# Altium PCB HRM_0.1.PcbDoc (part 1 of 2)
Units mm, origin at the board's own origin, x right, y up, seen from the top; angles counter-clockwise.
Board outline 50 x 50 mm, 2 copper layers (Top Layer, Bottom Layer), stack 1.62 mm thick; 75 components, 61 nets, 266 pads, 154 vias.
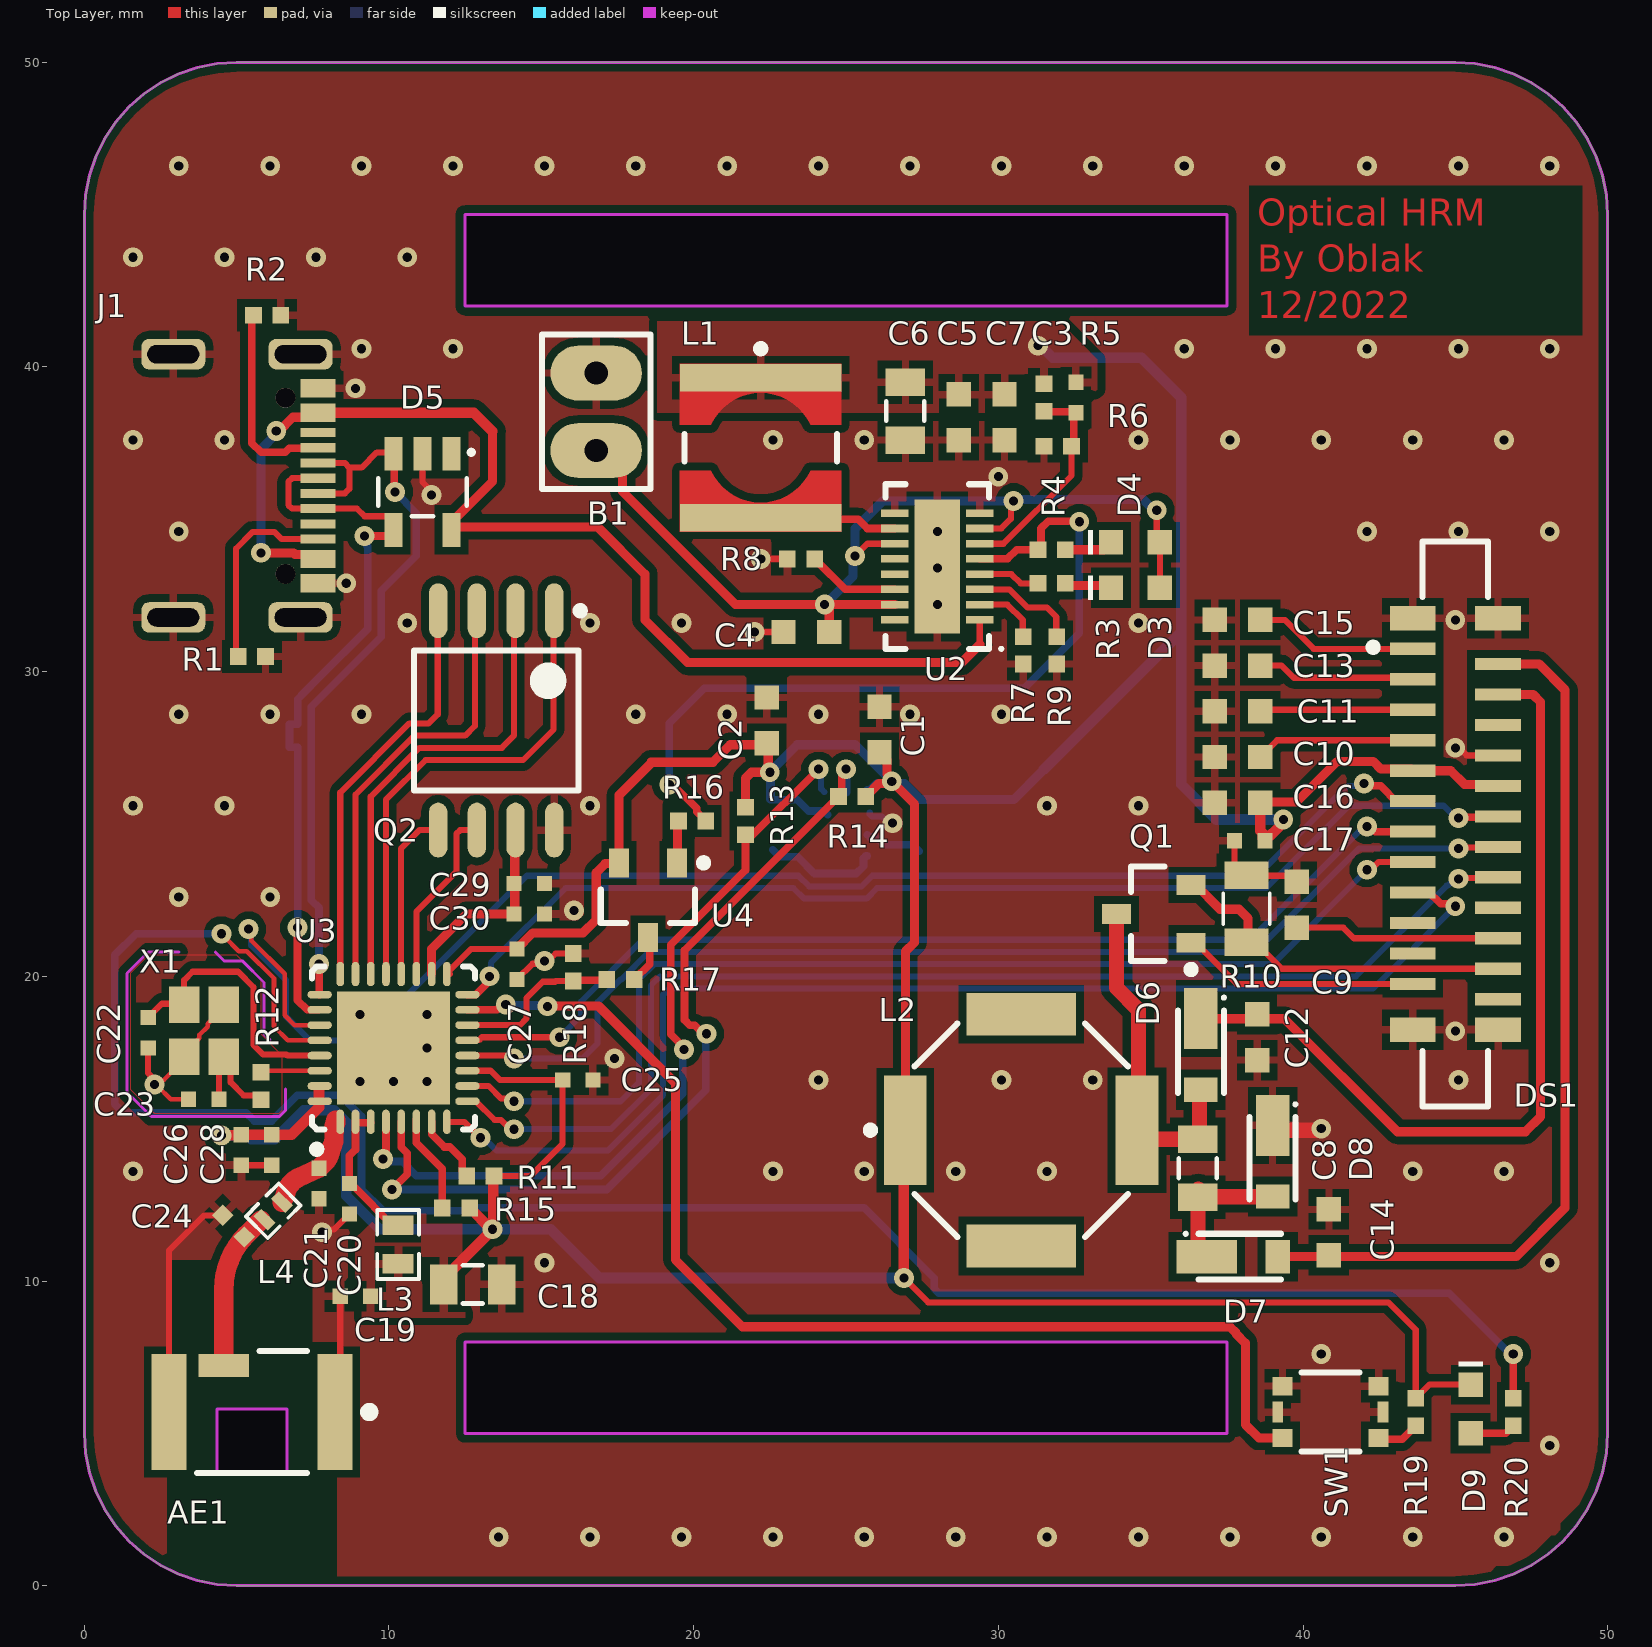
[diagram p0: Top Layer view]
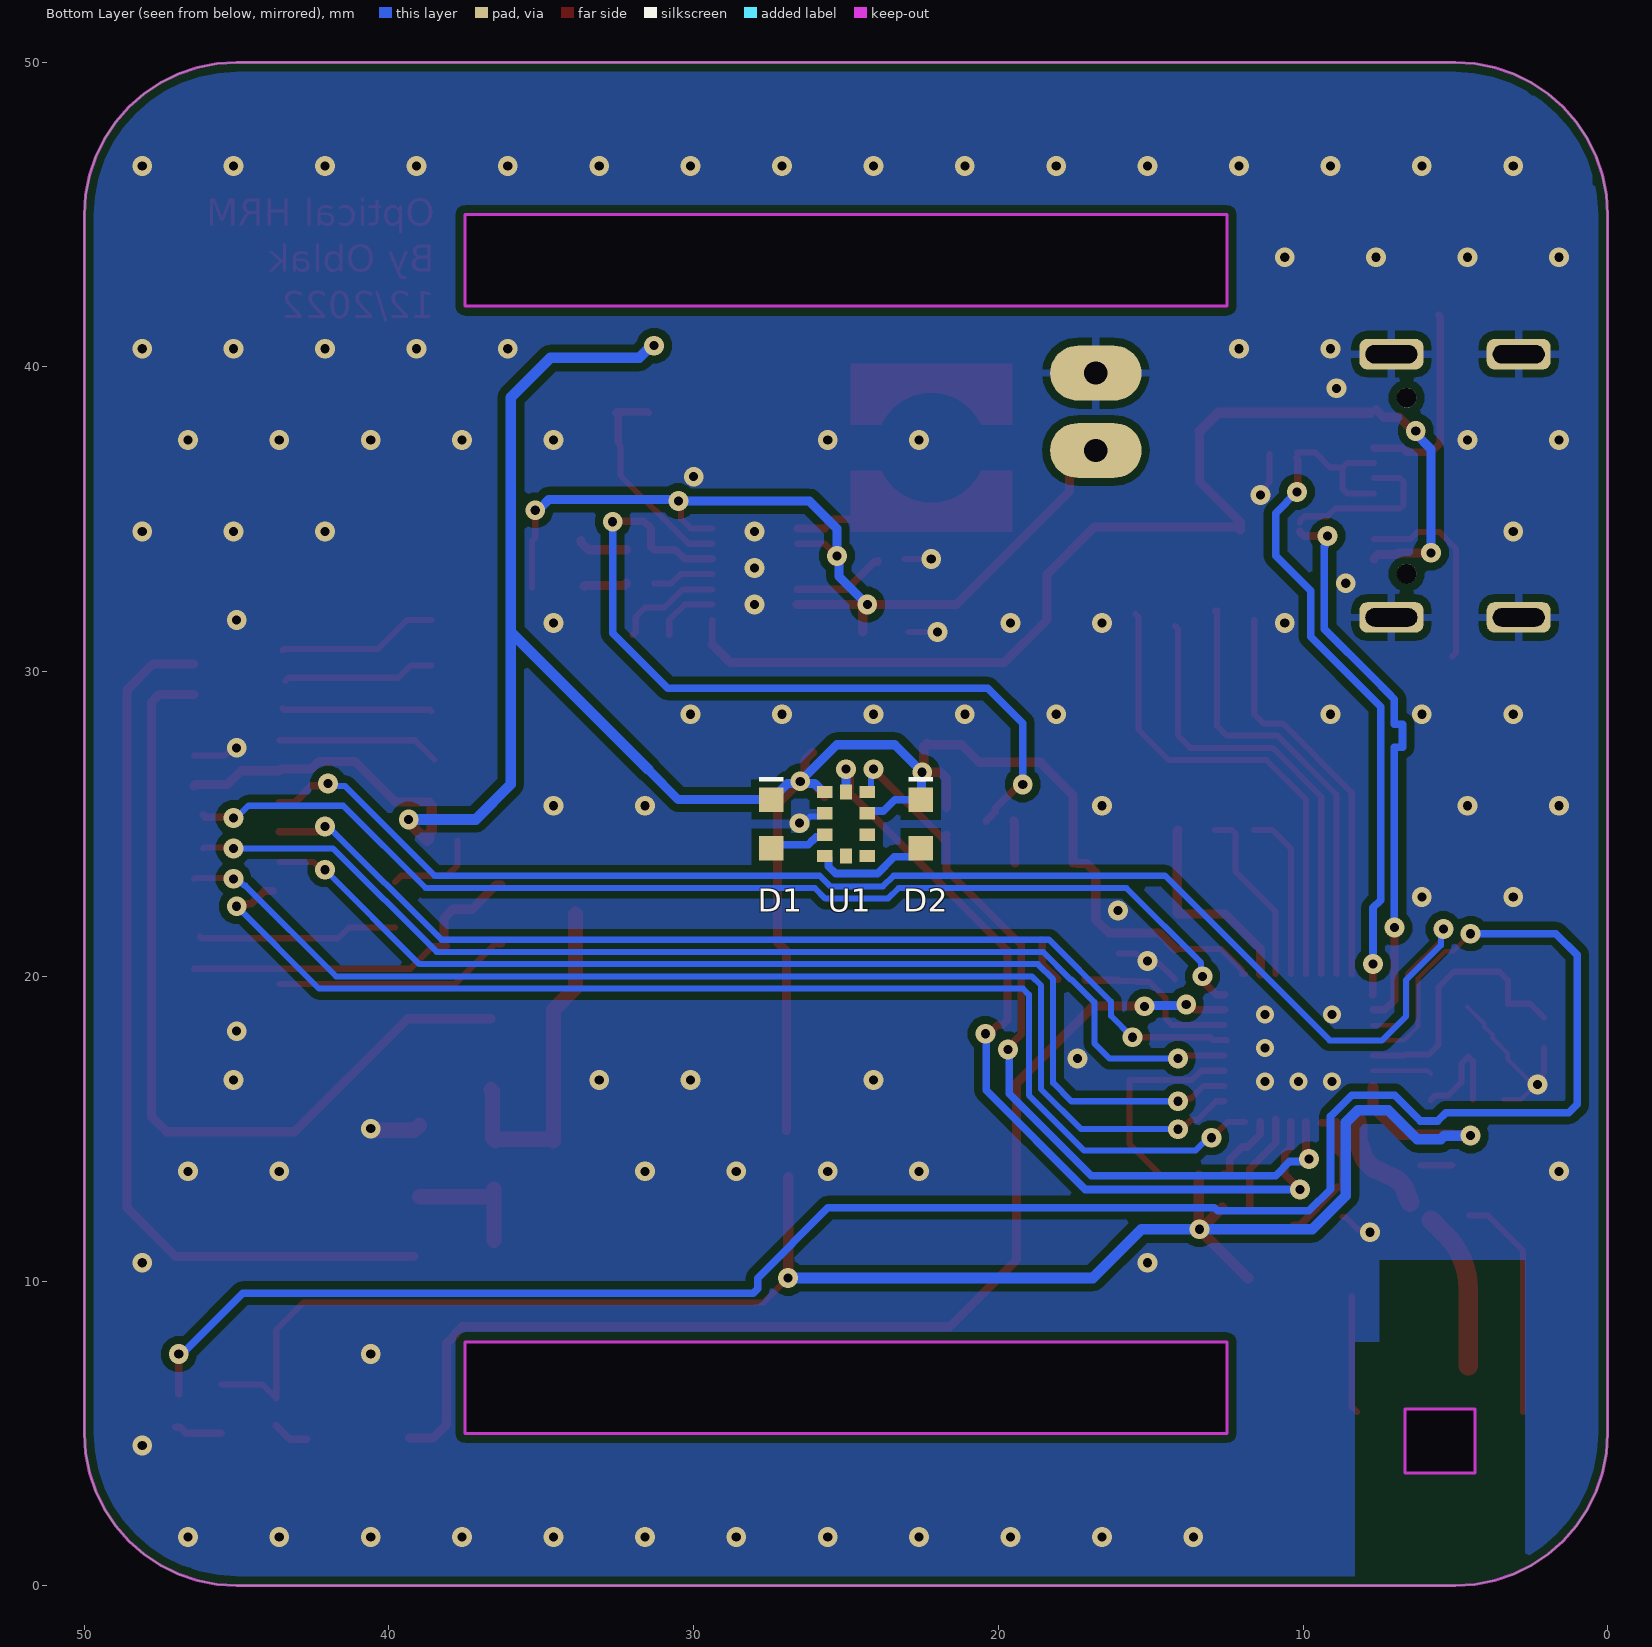
[diagram p1: Bottom Layer view, seen from below]
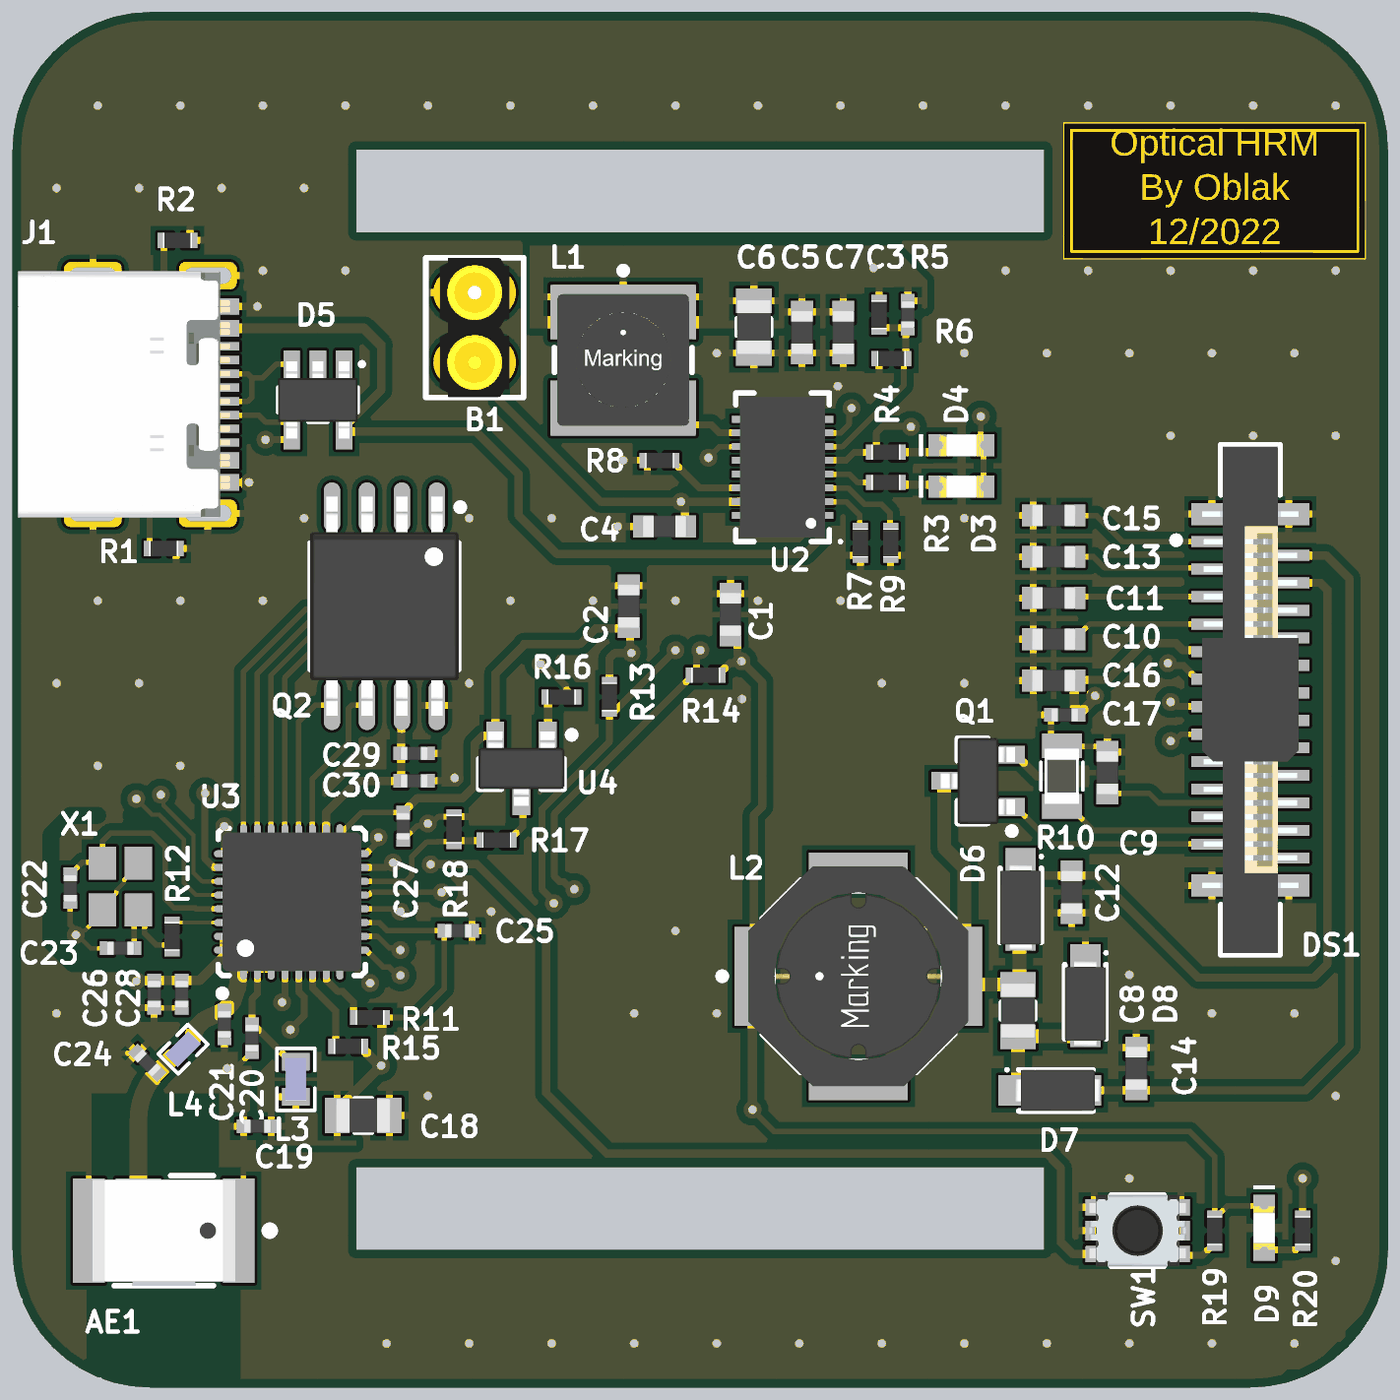
[diagram p2: 3D render of the assembled board from above, using the file's embedded part models]
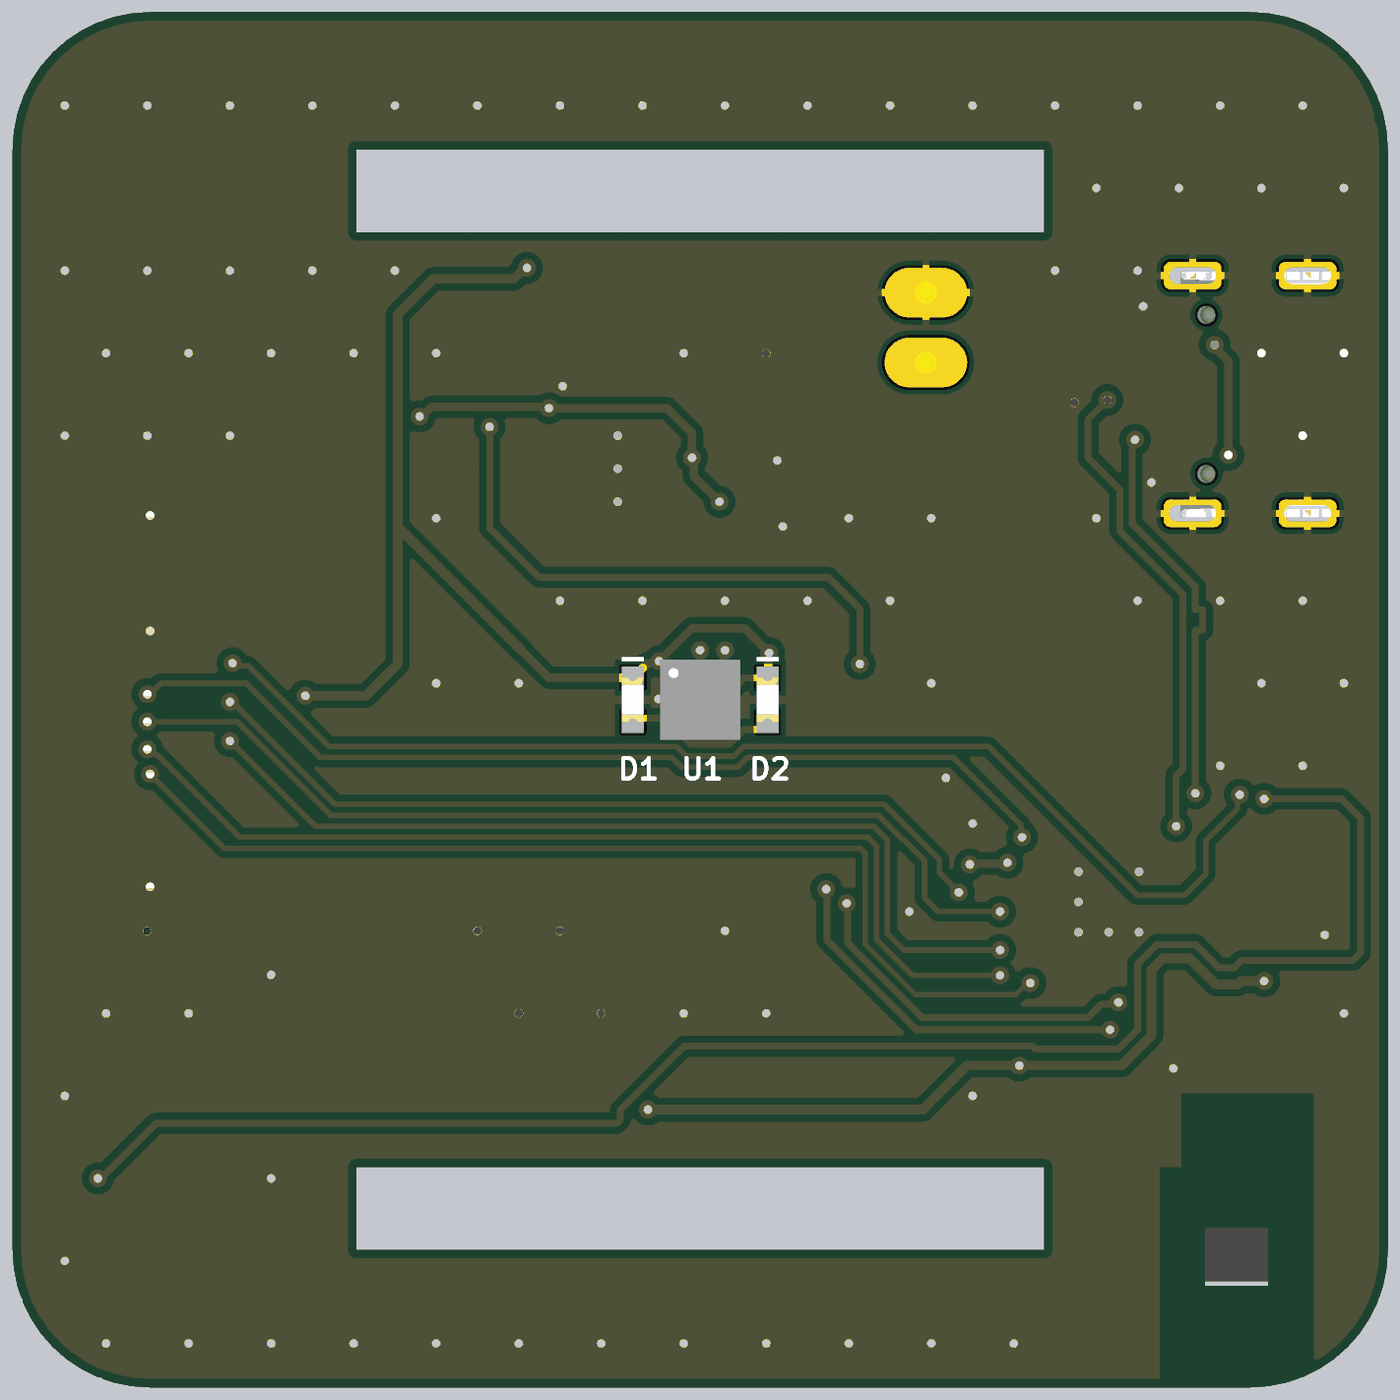
[diagram p3: 3D render of the assembled board from below, using the file's embedded part models]

## Layer stack, top to bottom
Top Solder: solder mask 0.01, Solder Resist, Dk 3.5
Top Layer: signal copper 0.035
Dielectric 1: dielectric 1.55, FR-4, Dk 4.6
Bottom Layer: signal copper 0.035
Bottom Solder: solder mask 0.01, Solder Resist, Dk 3.5

## Board outline
45,50 5,50 4.347,49.957 3.706,49.83 3.087,49.619 2.5,49.33 1.956,48.967 1.464,48.536 1.033,48.044 0.67,47.5 0.381,46.913 0.17,46.294 0.043,45.653 0,45 0,5 0.043,4.347 0.17,3.706 0.381,3.087 0.67,2.5 1.033,1.956 1.464,1.464 1.956,1.033 2.5,0.67 3.087,0.381 3.706,0.17 4.347,0.043 5,0 45,0 45.653,0.043 46.294,0.17 46.913,0.381 47.5,0.67 48.044,1.033 48.536,1.464 48.967,1.956 49.33,2.5 49.619,3.087 49.83,3.706 49.957,4.347 50,5 50,45 49.957,45.653 49.83,46.294 49.619,46.913 49.33,47.5 48.967,48.044 48.536,48.536 48.044,48.967 47.5,49.33 46.913,49.619 46.294,49.83 45.653,49.957
cut-out: 4.35,3.7 4.35,5.8 6.65,5.8 6.65,3.7
cut-out: 37.5,45 37.5,42 12.5,42 12.5,45
cut-out: 12.5,8 37.5,8 37.5,5 12.5,5

## Design rules (kind name [scope] priority, off if disabled: settings)
Clearance [All] p1: gap=0.254 ignorepadtopadclearanceinfootprint=TRUE except(0: Arc-Hole Track-Hole SMDPad-Hole THPad-Hole Via-Hole Fill-Hole Poly-Hole Region-Hole Text-Hole; 0.2: Arc-Arc Arc-Track Arc-SMDPad Arc-THPad Track-Track Track-SMDPad Track-THPad SMDPad-SMDPad SMDPad-THPad SMDPad-Via)
ComponentClearance [All] p1: gap=0.15 collisioncheckmode=3 verticalgap=0.254 showdistances=FALSE
PolygonConnect PolygonConnect_1 [isVia] p1: connectstyle=Direct reliefconductorwidth=0.254 reliefentries=4 polygonreliefangle="90 Angle" airgapwidth=0.254
PolygonConnect [All] p2: connectstyle=Relief reliefconductorwidth=0.254 reliefentries=4 polygonreliefangle="90 Angle" airgapwidth=0.254
RoutingVias [All] p1: holewidth=0.3 width=0.65 viastyle="Through Hole" minholewidth=0.25 minwidth=0.5 maxholewidth=5 maxwidth=10
SMDNeckDown [All] p1: percent=100.000
SolderMaskExpansion [All] p1: expansion=0.102 istentingtop=FALSE
Width Width_Antena [InNet('NetAE1_1')           or InNet('NetC21_2')] p1: maxlimit=0.637 minlimit=0.637 preferedwidth=0.637 impedanceprofiledriven=TRUE impedanceprofileid={48BE5413-D0CE-40BE-A353-7EF0BC3157F4} impedanceprofilevalue=50.000000 minimp=50.000000 maximp=50.000000 favimp=50.000000
Width [All] p2: maxlimit=10 minlimit=0.15 preferedwidth=0.35 minimp=50.000000 maximp=50.000000 favimp=50.000000
29 further rules are at their usual default settings.

## Classes and differential pairs
component class "U_USB-C PD": B1 C3 C4 C5 C6 C7 D3 D4 D5 J1 L1 R1 R2 R3 R4 R5 R6 R7 R8 R9 U2
component class U_HRM: C1 C2 D1 D2 U1
component class U_Display: C8 C9 C10 C11 C12 C13 C14 C15 C16 C17 D6 D7 D8 DS1 L2 Q1 R10
component class U_CPU: AE1 C18 C19 C20 C21 C22 C23 C24 C25 C26 C27 C28 C29 C30 D9 L3 L4 Q2 R11 R12 R13 R14 R15 R16 R17 R18 R19 R20 SW1 U3 U4 X1

## Components (designator, comment, footprint, x,y, rotation, side; value= is the part's Value field where it differs from the comment)
AE1 "7488960245" 7488960245 5.5,5.7 r180 top
B1 "Battery To be changed" letev2 16.8,37.26 r90 top
C1 "16V, 100nF" "0603_1.6x0.8x0.8mm_Reflow Soldering" 26.1,28.1 r270 top value=100nF
C2 "10V, 2.2uF" "0603_1.6x0.8x0.8mm_Reflow Soldering" 22.4,28.4 r270 top value=2.2uF
C3 "50V, 22pF" 0402_1x0.5x0.5mm 32.551,39 r90 top value=22pF
C4 "10V, 4.7uF" "0603_1.6x0.8x0.8mm_Reflow Soldering" 23.7,31.3 r0 top value=4.7uF
C5 "10V, 100nF" "0603_1.6x0.8x0.8mm_Reflow Soldering" 28.7,38.35 r90 top value=100nF
C6 "10V, 22uF" "0805_2x1.25x1.25mm_Reflow Soldering" 26.95,38.55 r90 top value=22uF
C7 "6.3V, 1uF" "0603_1.6x0.8x0.8mm_Reflow Soldering" 30.201,38.35 r90 top value=1uF
C8 "25V, 4.7uF" "0805_2x1.25x1.25mm_Reflow Soldering" 36.55,13.7 r90 top value=4.7uF
C9 "25V, 1uF" "0603_1.6x0.8x0.8mm_Reflow Soldering" 39.8,22.349 r270 top value=1uF
C10 "25V, 1uF" "0603_1.6x0.8x0.8mm_Reflow Soldering" 37.85,27.2 r0 top value=1uF
C11 "25V, 1uF" "0603_1.6x0.8x0.8mm_Reflow Soldering" 37.85,28.7 r0 top value=1uF
C12 "25V, 1uF" "0603_1.6x0.8x0.8mm_Reflow Soldering" 38.501,18 r90 top value=1uF
C13 "25V, 1uF" "0603_1.6x0.8x0.8mm_Reflow Soldering" 37.85,30.2 r0 top value=1uF
C14 "25V, 1uF" "0603_1.6x0.8x0.8mm_Reflow Soldering" 40.85,11.6 r270 top value=1uF
C15 "25V, 1uF" "0603_1.6x0.8x0.8mm_Reflow Soldering" 37.85,31.7 r0 top value=1uF
C16 "25V, 1uF" "0603_1.6x0.8x0.8mm_Reflow Soldering" 37.85,25.699 r0 top value=1uF
C17 "25V, 100nF" 0402_1x0.5x0.5mm 38.25,24.449 r0 top value=100nF
C18 "10V, 22uF" "0805_2x1.25x1.25mm_Reflow Soldering" 12.749,9.886 r0 top value=22uF
C19 "25V, 100nF" 0402_1x0.5x0.5mm 8.9,9.5 r0 top value=100nF
C20 "25V, 100nF" 0402_1x0.5x0.5mm 8.7,12.7 r90 top value=100nF
C21 "TBD" 0402_1x0.5x0.5mm 7.7,13.2 r90 top value=2.2pF
C22 "TBD" 0402_1x0.5x0.5mm 2.096,18.15 r90 top value=2.2pF
C23 "TBD" 0402_1x0.5x0.5mm 3.923,15.965 r0 top value=2.2pF
C24 "TBD" 0402_1x0.5x0.5mm 4.9,11.8 r315 top value=2.2pF
C25 "25V, 100nF" 0402_1x0.5x0.5mm 16.2,16.6 r180 top value=100nF
C26 "10V, 1uF" 0402_1x0.5x0.5mm 5.15,14.3 r90 top value=1uF
C27 "25V, 100nF" 0402_1x0.5x0.5mm 14.2,20.4 r90 top value=100nF
C28 "10V, 10nF" 0402_1x0.5x0.5mm 6.15,14.3 r90 top value=10nF
C29 "25V, 100nF" 0402_1x0.5x0.5mm 14.6,23.05 r180 top value=100nF
C30 "10V, 1uF" 0402_1x0.5x0.5mm 14.6,22.05 r180 top value=1uF
D1 "Bright Green, 2V, 140°" WL-SMCW_0603_150060xx75003 27.45,25 r270 bottom
D2 "Bright Green, 2V, 140°" WL-SMCW_0603_150060xx75003 22.55,25 r270 bottom
D3 "Amber, 2V, 140°" WL-SMCW_0603_150060xx75000 34.5,32.75 r0 top
D4 "Amber, 2V, 140°" WL-SMCW_0603_150060xx75000 34.5,34.25 r0 top
D5 "5V" WE-TVS_SOT23-5L 11.1,35.9 r180 top
D6 "CUHS20F40" "Topshiba US2H" 36.65,17.45 r270 top
D7 "CUHS20F40" "Topshiba US2H" 38,10.8 r0 top
D8 "CUHS20F40" "Topshiba US2H" 39,13.95 r270 top
D9 "Green, 3.2V, 140°" WL-SMCW_0603_150060xx75003 45.5,5.8 r270 top
DS1 "1.54” TFT EPD Panel" 687324124422 45,25 r90 top
J1 "USB C connector" USB4105-15-A-120 7.1,36.1 r270 top
L1 "1.8µH, 2.7A" WE-TPC_4828 22.2,37.35 r0 top
L2 "10µH, 2A" WE-TPC_8020 30.75,14.95 r90 top
L3 "2nH, 1.9A" "0603CT SERIES" 10.3,11.2 r90 top
L4 "TBD" "0402CS SERIES" 6.2,12.3 r225 top
Q1 "PJA3430" SOT23 35.1,22.05 r180 top
Q2 "BC857" SOT23 18.5,22.5 r270 top
R1 "Res2-smd" R0402 5.5,30.5 r180 top value=36k
R2 "Res2-smd" R0402 6,41.7 r180 top value=36k
R3 "220R" R0402 31.75,32.9 r180 top
R4 "220R" R0402 31.75,34 r180 top
R5 "Res2-smd" R0402 31.501,39 r90 top value=453k
R6 "Res2-smd" R0402 31.951,37.4 r0 top value=453k
R7 "Res2-smd" R0402 30.82,30.7 r90 top value="2k1 1%"
R8 "Res2-smd" R0402 23.523,33.7 r0 top value="1k24 1%"
R9 "Res2-smd" R0402 31.921,30.7 r90 top value="1k 1%"
R10 "Res2-smd" RES0805_1 38.148,22.222 r270 top value=0.47R
R11 "10k" R0402 13,13.45 r0 top
R12 "TBD" R0402 5.8,16.4 r270 top
R13 "10k" R0402 21.7,25.1 r90 top
R14 "10k" R0402 25.2,25.9 r0 top
R15 "10k" R0402 12.2,12.4 r0 top
R16 "1k" R0402 19.95,25.1 r0 top
R17 "4k7" R0402 17.6,19.9 r0 top
R18 "22k" R0402 16.05,20.3 r270 top
R19 "10k" R0402 43.7,5.7 r90 top
R20 "220R" R0402 46.9,5.7 r270 top
SW1 "435151014845" WS-TASV_L3W2.6H1.4_4351x10148xx 40.9,5.7 r0 top
U1 "BH1790GLC" WLGA010V28_ROHM 25,25 r180 bottom locked
U2 "LTC3550" "DHC16 Linear" 27.995,33.45 r180 top
U3 "ESP32-C3" "32L SLP Expressif" 10.15,17.65 r90 top
U4 "AT25SF041B" "SOIC8 Wide dialog semi" 13.52,28.4 r270 top
X1 "ECX-2236B2" "2.5 x 2.0 mm XTAL" 3.923,18.215 r270 top

## Footprints (in the part's own frame and the unit in brackets; to place one, negate y for a bottom-side part, rotate by r counter-clockwise, add the part's x,y. Pads: shape width x height; smd on the part's side, far side on the other; paste and mask are expansions set on the pad)
"2.5 x 2.0 mm XTAL" [mm]
  rect 1.2x1 smd: 1(-0.85,-0.65) 2(0.85,-0.65) 3(0.85,0.65) 4(-0.85,0.65)
  body extent -1.25,-1 1.25,1, height 0.25
"32L SLP Expressif" [mm] "QFN, 32-Leads, Body 5,00x5,00mm, Pitch 0,50mm, Thermal Pad 3,70x3,70mm, IPC Medium Density"
  oval 0.8x0.25 smd: 1(-2.425,1.75) 2(-2.425,1.25) 3(-2.425,0.75) 4(-2.425,0.25) 5(-2.425,-0.25) 6(-2.425,-0.75) 7(-2.425,-1.25) 8(-2.425,-1.75) 17(2.425,-1.75) 18(2.425,-1.25) 19(2.425,-0.75) 20(2.425,-0.25) 21(2.425,0.25) 22(2.425,0.75) 23(2.425,1.25) 24(2.425,1.75)
  oval 0.25x0.8 smd: 9(-1.75,-2.425) 10(-1.25,-2.425) 11(-0.75,-2.425) 12(-0.25,-2.425) 13(0.25,-2.425) 14(0.75,-2.425) 15(1.25,-2.425) 16(1.75,-2.425) 25(1.75,2.425) 26(1.25,2.425) 27(0.75,2.425) 28(0.25,2.425) 29(-0.25,2.425) 30(-0.75,2.425) 31(-1.25,2.425) 32(-1.75,2.425)
  rect 3.7x3.7 smd: 33(0,0)
  silkscreen extent -3.45,-2.68 2.68,2.67, body extent -2.53,-2.53 2.53,2.53, height 0.9
0402_1x0.5x0.5mm [mm] "Ceramic Capacitors, 0402, body 1x0.5mm"
  rect 0.5x0.5 smd: 1(-0.5,0) 2(0.5,0)
  body extent -0.5,-0.25 0.5,0.25, height 0.53
"0402CS SERIES" [mil] "Coilcraft Chip Inductor"
  rect 14x26 smd: 1(-16,0) 2(16,0)
  silkscreen extent -30,-20 30,20, body extent -23,-13 23,13, height 26
"0603_1.6x0.8x0.8mm_Reflow Soldering" [mm] "Ceramic Capacitors, 0603, body 1.6x0.8mm"
  rect 0.8x0.8 smd: 1(-0.75,0) 2(0.75,0)
  body extent -0.8,-0.4 0.8,0.4, height 0.83
"0603CT SERIES" [mil] "Coilcraft Chip Inductor"
  rect 25x40 smd: 1(-25,0) 2(25,0)
  silkscreen extent -44,-27 44,27, body extent -30,-15 30,15, height 21
"0805_2x1.25x1.25mm_Reflow Soldering" [mm] "Ceramic Capacitors, 0805, body 2x1.25mm"
  rect 0.9x1.3 smd: 1(-0.95,0) 2(0.95,0)
  silkscreen extent -0.32,-0.62 0.32,0.63, body extent -1,-0.62 1,0.63, height 1.28
7488960245 [mm] "SMT-Multilayer Chip Antenne, body size 5.2x3.7mm"
  rect 1.65x0.75 smd: 1(0.925,-1.525)
  rect 1.15x3.8 smd: 2(-2.725,0) 3(2.725,0)
  silkscreen extent -4,-2 1.8,2, body extent -2.6,-1.85 2.6,1.85, height 0.7
687324124422 [mm] "ZIF Connectors, Vertical, Type A, pitch 0.5mm, 24p"
  rect 0.4x1.5 smd: 1(-5.75,-1.4) 2(-5.25,1.4) 3(-4.75,-1.4) 4(-4.25,1.4) 5(-3.75,-1.4) 6(-3.25,1.4) 7(-2.75,-1.4) 8(-2.25,1.4) 9(-1.75,-1.4) 10(-1.25,1.4) 11(-0.75,-1.4) 12(-0.25,1.4) 13(0.25,-1.4) 14(0.75,1.4) 15(1.25,-1.4) 16(1.75,1.4) 17(2.25,-1.4) 18(2.75,1.4) 19(3.25,-1.4) 20(3.75,1.4) 21(4.25,-1.4) 22(4.75,1.4) 23(5.25,-1.4) 24(5.75,1.4)
  rect 0.8x1.5 smd: M1(-6.75,-1.4) M2(-6.75,1.4) M3(6.75,-1.4) M4(6.75,1.4)
  silkscreen extent -9.27,-1.07 9.28,2.82, body extent -9.2,-1.75 9.2,1.75, height 4.92
"DHC16 Linear" [mm] "SON, 16-Leads, Body 5,00x3,00mm, Pitch 0,50mm, Thermal Pad 4,40x1,49mm, IPC Medium Density"
  rect 0.9x0.25 smd: 1(-1.395,1.75) 2(-1.395,1.25) 3(-1.395,0.75) 4(-1.395,0.25) 5(-1.395,-0.25) 6(-1.395,-0.75) 7(-1.395,-1.25) 8(-1.395,-1.75) 9(1.395,-1.75) 10(1.395,-1.25) 11(1.395,-0.75) 12(1.395,-0.25) 13(1.395,0.25) 14(1.395,0.75) 15(1.395,1.25) 16(1.395,1.75)
  rect 1.49x4.4 smd: 17(0,0)
  silkscreen extent -2.15,-2.7 1.7,2.75, body extent -1.55,-2.55 1.55,2.55, height 0.8
letev2 [mm]
  oval 1.8x3 hole 0.762: 1(0,0) 2(2.54,0)
  silkscreen extent -1.27,-1.78 3.81,1.78, body extent -1.27,-1.27 3.81,1.27, height 5.1
R0402 [mm]
  rect 0.55x0.55 smd: 1(-0.45,0) 2(0.45,0)
  body extent -0.53,-0.28 0.53,0.28, height 0.37
RES0805_1 [mm]
  rect 0.9x1.45 smd: 1(-1.1,0) 2(1.1,0)
  silkscreen extent -0.51,-0.76 0.51,0.76, body extent -1,-0.64 1,0.62, height 0.62
"SOIC8 Wide dialog semi" [mm] "SOIC, 8-Leads, Body 5,24x5,29mm, Pitch 1,27mm, IPC Medium Density"
  oval 1.8x0.6 smd: 1(-3.6,1.905) 2(-3.6,0.635) 3(-3.6,-0.635) 4(-3.6,-1.905) 5(3.6,-1.905) 6(3.6,-0.635) 7(3.6,0.635) 8(3.6,1.905)
  silkscreen extent -3.72,-2.7 2.3,2.88, body extent -3.99,-2.7 3.99,2.7, height 2.16
SOT23 [mm] "SOT23, 3-Leads, Body 2,93x2,40mm, Pitch 0,95mm, IPC Medium Density"
  rect 0.95x0.65 smd: 1(-1.225,0.95) 2(-1.225,-0.95) 3(1.225,0)
  silkscreen extent -1.35,-1.55 0.75,1.95, body extent -1.35,-1.57 1.35,1.57, height 1.2
"Topshiba US2H" [mm] "Molded Diode, 2-Leads, Body 2,50x1,40mm, IPC Medium Density"
  rect 2x1.1 smd: 1(-1.16,0)
  rect 0.8x1.1 smd: 2(1.175,0)
  silkscreen extent -1.9,-0.75 1.27,0.8, body extent -1.57,-0.75 1.57,0.75, height 0.7
USB4105-15-A-120 [mm]
  rect 0.6x1.15 smd: A1(-3.2,0.575) A4(-2.4,0.575) A9(2.4,0.575) A12(3.2,0.575)
  rect 0.3x1.15 smd: A5(-1.25,0.575) A6(-0.25,0.575) A7(0.25,0.575) A8(1.25,0.575) B5(1.75,0.575) B6(0.75,0.575) B7(-0.75,0.575) B8(-1.75,0.575)
  rrect50% 1x2.1 hole 0.6 slot 1.7 at 90 deg: Shield(-4.32,0) Shield(-4.32,-4.18) Shield(4.32,0) Shield(4.32,-4.18)
  round 0.65 hole 0.65 unplated: ""(-2.89,-0.5) ""(2.89,-0.5)
  body extent -4.47,-6.9 4.47,0.8, height 3.26
WE-TPC_4828 [mm] "Power Inductor, SMD, 2-Leads, body 4.8x4.8mm"
  rect 5.3x0.9 smd paste-403.566 mask-403.566: 1(0,2.3) 2(0,-2.3)
  Top Layer region: 2.65,-0.75 1.636,-0.75 1.636,-0.75 1.138,-1.394 0.407,-1.753 -0.407,-1.753 -1.138,-1.394 -1.636,-0.75 -1.636,-0.75 -2.65,-0.75 -2.65,-0.75 -2.65,-2.75 2.65,-2.75
  Top Layer region: -2.65,0.75 -1.636,0.75 -1.636,0.75 -1.138,1.394 -0.407,1.753 0.407,1.753 1.138,1.394 1.636,0.75 1.636,0.75 2.65,0.75 2.65,0.75 2.65,2.75 -2.65,2.75
  silkscreen extent -2.5,-0.45 2.5,3.37, body extent -2.4,-2.4 2.4,2.4, height 2.8
WE-TPC_8020 [mm] "Power Inductor, SMD, 4-Leads, body 8.0x8.0mm"
  rect 3.6x1.4 smd: 1(0,3.8) 2(0,-3.8)
  rect 1.4x3.6 smd: MP1(-3.8,0) MP2(3.8,0)
  silkscreen extent -3.5,-3.5 3.5,5.07, body extent -4,-4 4,4, height 1.8
WE-TVS_SOT23-5L [mm] "TVS Diode, package SOT23-5L"
  rect 0.6x1.1 smd: 1(-0.95,-1.25) 2(0,-1.25) 3(0.95,-1.25) 4(0.95,1.25) 5(-0.95,1.25)
  silkscreen extent -1.68,-1.37 1.45,0.8, body extent -1.45,-1.4 1.45,1.4, height 1.16
WL-SMCW_0603_150060xx75000 [mm] "SMD Mono-color Chip LED, body 1.6x0.8mm"
  rect 0.8x0.8 smd: A(0.8,0) K(-0.8,0)
  silkscreen extent -1.55,-0.4 -1.4,0.4, body extent -0.8,-0.4 0.8,0.4, height 0.7
WL-SMCW_0603_150060xx75003 [mm] "SMD Mono-color Chip LED, body 1.6x0.8mm"
  rect 0.8x0.8 smd: A(-0.8,0) K(0.8,0)
  silkscreen extent -1.55,-0.4 -1.4,0.4, body extent -0.8,-0.4 0.8,0.4, height 0.7
WLGA010V28_ROHM [mm] "LGA, 10-Leads, Body 2,80x2,80mmx1,00mm, Pitch 0,70mm"
  rect 0.5x0.4 smd: 1(-0.7,1.05) 2(-0.7,0.35) 3(-0.7,-0.35) 4(-0.7,-1.05) 6(0.7,-1.05) 7(0.7,-0.35) 8(0.7,0.35) 9(0.7,1.05)
  rect 0.4x0.5 smd: 5(0,-1.05) 10(0,1.05)
  body extent -1.45,-1.45 1.45,1.45, height 1
WS-TASV_L3W2.6H1.4_4351x10148xx [mm] "SMD Tact Switch, body 3x2.6mm"
  rect 0.65x0.6 smd: A1(-1.575,0.85) A2(1.575,0.85) B1(-1.575,-0.85) B2(1.575,-0.85)
  rect 0.35x0.7 smd: G1(-1.725,0) G2(1.725,0)
  silkscreen extent -0.95,-1.3 0.95,1.3, body extent -1.75,-1.3 1.75,1.3, height 1.43

## Part data
AE1: "WE-MCA SMT Multilayer Chip Antenna, 1 Band, 2400-2500MHz, 50Ω", Frequency Range=2400-2500MHz, Manufacturer="Wurth Elektronik", Operating Temperature Max=85°C, Operating Temperature Min=-40°C, Category=Antennas, ComponentLink1Description="Website Link", ComponentLink1URL=https://www.we-online.com/redexpert/article/7488960245?ad, ComponentLink2Description="Datasheet Link", ComponentLink2URL=https://www.we-online.com/redexpert/spec/7488960245?ad, Height=0.7mm, Impedance=50Ω, Length=5.2mm, Manufacturer Part Number=7488960245, Match Code=WE-MCA, Mount="Surface Mount", Number of Bands=1, Packaging="Tape and Reel", Peak Gain=3dBi, VSWR=2.5, Width=3.7mm
B1: library part header2
C1: library part 885012206046, "WCAP-CSGP Ceramic Capacitors, 0603, X7R, 16V, 100nF", Operating Temperature="-55 °C to +125 °C", Rated Voltage="16V DC", Ceramic Type=X7R, ComponentLink1Description=Manufacturer, ComponentLink1URL=http://www.we-online.de, ComponentLink2Description=Datasheet, ComponentLink2URL=http://katalog.we-online.de/pbs/datasheet/885012206046.pdf, Part Number=885012206046, Published Date="Oct. 2017", Publisher="Wurth Elektronik", Size=0603
C2: library part 885012206027, "WCAP-CSGP Ceramic Capacitors, 0603, X7R, 10V, 2.2uF", Operating Temperature="-55 °C to +125 °C", Rated Voltage="10V DC", Ceramic Type=X7R, ComponentLink1Description=Manufacturer, ComponentLink1URL=http://www.we-online.de, ComponentLink2Description=Datasheet, ComponentLink2URL=http://katalog.we-online.de/pbs/datasheet/885012206027.pdf, Part Number=885012206027, Published Date="Oct. 2017", Publisher="Wurth Elektronik", Size=0603
C3: library part 885012005057, "WCAP-CSGP Ceramic Capacitors, 0402, NP0, 50V, 22pF", Operating Temperature="-55 °C to +125 °C", Rated Voltage="50V DC", Ceramic Type=NP0, ComponentLink1Description=Manufacturer, ComponentLink1URL=http://www.we-online.de, ComponentLink2Description=Datasheet, ComponentLink2URL=http://katalog.we-online.de/pbs/datasheet/885012005057.pdf, Part Number=885012005057, Published Date="Oct. 2017", Publisher="Wurth Elektronik", Size=0402
C4: library part 885012106012, "WCAP-CSGP Ceramic Capacitors, 0603, X5R, 10V, 4.7uF", Operating Temperature="-55 °C to +125 °C", Rated Voltage="10V DC", Ceramic Type=X5R, ComponentLink1Description=Manufacturer, ComponentLink1URL=http://www.we-online.de, ComponentLink2Description=Datasheet, ComponentLink2URL=http://katalog.we-online.de/pbs/datasheet/885012106012.pdf, Part Number=885012106012, Published Date="Oct. 2017", Publisher="Wurth Elektronik", Size=0603
C5: library part 885012206020, "WCAP-CSGP Ceramic Capacitors, 0603, X7R, 10V, 100nF", Operating Temperature="-55 °C to +125 °C", Rated Voltage="10V DC", Ceramic Type=X7R, ComponentLink1Description=Manufacturer, ComponentLink1URL=http://www.we-online.de, ComponentLink2Description=Datasheet, ComponentLink2URL=http://katalog.we-online.de/pbs/datasheet/885012206020.pdf, Part Number=885012206020, Published Date="Oct. 2017", Publisher="Wurth Elektronik", Size=0603
C6 C18: library part 885012107011, "WCAP-CSGP Ceramic Capacitors, 0805, X5R, 10V, 22uF", Operating Temperature="-55 °C to +125 °C", Rated Voltage="10V DC", Ceramic Type=X5R, ComponentLink1Description=Manufacturer, ComponentLink1URL=http://www.we-online.de, ComponentLink2Description=Datasheet, ComponentLink2URL=http://katalog.we-online.de/pbs/datasheet/885012107011.pdf, Part Number=885012107011, Published Date="Oct. 2017", Publisher="Wurth Elektronik", Size=0805
C7: library part 885012106003, "WCAP-CSGP Ceramic Capacitors, 0603, X5R, 6.3V, 1uF", Operating Temperature="-55 °C to +125 °C", Rated Voltage="6.3V DC", Ceramic Type=X5R, ComponentLink1Description=Manufacturer, ComponentLink1URL=http://www.we-online.de, ComponentLink2Description=Datasheet, ComponentLink2URL=http://katalog.we-online.de/pbs/datasheet/885012106003.pdf, Part Number=885012106003, Published Date="Oct. 2017", Publisher="Wurth Elektronik", Size=0603
C8: library part 885012107018, "WCAP-CSGP Ceramic Capacitors, 0805, X5R, 25V, 4.7uF", Operating Temperature="-55 °C to +125 °C", Rated Voltage="25V DC", Ceramic Type=X5R, ComponentLink1Description=Manufacturer, ComponentLink1URL=http://www.we-online.de, ComponentLink2Description=Datasheet, ComponentLink2URL=http://katalog.we-online.de/pbs/datasheet/885012107018.pdf, Part Number=885012107018, Published Date="Oct. 2017", Publisher="Wurth Elektronik", Size=0805
C9 C10 C11 C12 C13 C14 C15 C16: library part 885012106022, "WCAP-CSGP Ceramic Capacitors, 0603, X5R, 25V, 1uF", Operating Temperature="-55 °C to +125 °C", Rated Voltage="25V DC", Ceramic Type=X5R, ComponentLink1Description=Manufacturer, ComponentLink1URL=http://www.we-online.de, ComponentLink2Description=Datasheet, ComponentLink2URL=http://katalog.we-online.de/pbs/datasheet/885012106022.pdf, Part Number=885012106022, Published Date="Oct. 2017", Publisher="Wurth Elektronik", Size=0603
C17 C19 C20 C25 C27 C29: library part 885012105018, "WCAP-CSGP Ceramic Capacitors, 0402, X5R, 25V, 100nF", Operating Temperature="-55 °C to +125 °C", Rated Voltage="25V DC", Ceramic Type=X5R, ComponentLink1Description=Manufacturer, ComponentLink1URL=http://www.we-online.de, ComponentLink2Description=Datasheet, ComponentLink2URL=http://katalog.we-online.de/pbs/datasheet/885012105018.pdf, Part Number=885012105018, Published Date="Oct. 2017", Publisher="Wurth Elektronik", Size=0402
C21 C22 C23 C24: library part 885012005021, "WCAP-CSGP Ceramic Capacitors, 0402, NP0, 16V, 2.2pF", Operating Temperature="-55 °C to +125 °C", Rated Voltage="16V DC", Ceramic Type=NP0, ComponentLink1Description=Manufacturer, ComponentLink1URL=http://www.we-online.de, ComponentLink2Description=Datasheet, ComponentLink2URL=http://katalog.we-online.de/pbs/datasheet/885012005021.pdf, Part Number=885012005021, Published Date="Oct. 2017", Publisher="Wurth Elektronik", Size=0402
C26 C30: library part 885012105012, "WCAP-CSGP Ceramic Capacitors, 0402, X5R, 10V, 1uF", Operating Temperature="-55 °C to +125 °C", Rated Voltage="10V DC", Ceramic Type=X5R, ComponentLink1Description=Manufacturer, ComponentLink1URL=http://www.we-online.de, ComponentLink2Description=Datasheet, ComponentLink2URL=http://katalog.we-online.de/pbs/datasheet/885012105012.pdf, Part Number=885012105012, Published Date="Oct. 2017", Publisher="Wurth Elektronik", Size=0402
C28: library part 885012205012, "WCAP-CSGP Ceramic Capacitors, 0402, X7R, 10V, 10nF", Operating Temperature="-55 °C to +125 °C", Rated Voltage="10V DC", Ceramic Type=X7R, ComponentLink1Description=Manufacturer, ComponentLink1URL=http://www.we-online.de, ComponentLink2Description=Datasheet, ComponentLink2URL=http://katalog.we-online.de/pbs/datasheet/885012205012.pdf, Part Number=885012205012, Published Date="Oct. 2017", Publisher="Wurth Elektronik", Size=0402
D1 D2: library part 150060VS75003, "WL-SMCW Mono-color Chip LED Waterclear, SMT, size 0603, Bright Green, 2V, 140°", Case/Size Code=0603, Emitting Color="Bright Green", Forward Voltage=2V, Manufacturer="Wurth Elektronik", Operating Temperature Max=100°C, Operating Temperature Min=-40°C, Category="Signal LEDs", Chip Technology=AlInGaP, ComponentLink1Description="Website Link", ComponentLink1URL=https://www.we-online.com/redexpert/article/150060VS75003?ad, ComponentLink2Description="Datasheet Link", ComponentLink2URL=https://www.we-online.com/redexpert/spec/150060VS75003?ad, Dominant Wavelength=570nm, Height=0.7mm, Length=1.6mm, Luminous Intensity=100mcd, Manufacturer Part Number=150060VS75003, Match Code=WL-SMCW, Mount="Surface Mount", Packaging="Tape and Reel", Peak Wavelength=572nm, Viewing Angle=140°, Width=0.8mm
D3 D4: library part 150060AS75000, "WL-SMCW Mono-color Chip LED Waterclear, SMT, size 0603, Amber, 2V, 140°", Case/Size Code=0603, Emitting Color=Amber, Forward Voltage=2V, Manufacturer="Wurth Elektronik", Operating Temperature Max=85°C, Operating Temperature Min=-40°C, Category="Signal LEDs", Chip Technology=AlInGaP, ComponentLink1Description="Website Link", ComponentLink1URL=https://www.we-online.com/redexpert/article/150060AS75000?ad, ComponentLink2Description="Datasheet Link", ComponentLink2URL=https://www.we-online.com/redexpert/spec/150060AS75000?ad, Dominant Wavelength=605nm, Height=0.7mm, Length=1.6mm, Luminous Intensity=130mcd, Manufacturer Part Number=150060AS75000, Match Code=WL-SMCW, Mount="Surface Mount", Packaging="Tape and Reel", Peak Wavelength=610nm, Viewing Angle=140°, Width=0.8mm
D5: library part 824011, "WE-TVS TVS Diode – High Speed Series, SOT23-5L, 2+1 Channel, 5V, 2pF", (Reverse) Breakdown Voltage=6.1V, (Reverse) Peak Pulse Current=13A, Case/Size Code=SOT23-5L, Channel ESD Clamping Voltage=13V, Channel Input Capacitance=2pF, Channel Reverse Leakage Current=1µA, Manufacturer="Wurth Elektronik", Operating Temperature Max=125°C, Operating Temperature Min=-55°C, Category="ESD Protection", Channel Operating Voltage=5V, ComponentLink1Description="Website Link", ComponentLink1URL=https://www.we-online.com/redexpert/article/824011?ad, ComponentLink2Description="Datasheet Link", ComponentLink2URL=https://www.we-online.com/redexpert/spec/824011?ad, ESD Air Discharge Capability=24kV, ESD Contact Discharge Capability=16kV, Height=1.16mm, Length=2.9mm, Manufacturer Part Number=824011, Match Code=WE-TVS, Mount="Surface Mount", Number of Channels=2+1, Packaging="Tape and Reel", Polarity=Unidirectional, Width=2.8mm
D6 D7 D8: "Schottky Barrier Diode Silicon Epitaxia"
D9: library part 150060GS75003, "WL-SMCW Mono-color Chip LED Waterclear, SMT, size 0603, Green, 3.2V, 140°", Case/Size Code=0603, Emitting Color=Green, Forward Voltage=3.2V, Manufacturer="Wurth Elektronik", Operating Temperature Max=100°C, Operating Temperature Min=-40°C, Category="Signal LEDs", Chip Technology=InGaN, ComponentLink1Description="Website Link", ComponentLink1URL=https://www.we-online.com/redexpert/article/150060GS75003?ad, ComponentLink2Description="Datasheet Link", ComponentLink2URL=https://www.we-online.com/redexpert/spec/150060GS75003?ad, Dominant Wavelength=525nm, Height=0.7mm, Length=1.6mm, Luminous Intensity=1600mcd, Manufacturer Part Number=150060GS75003, Match Code=WL-SMCW, Mount="Surface Mount", Packaging="Tape and Reel", Peak Wavelength=515nm, Viewing Angle=140°, Width=0.8mm
DS1: library part E2154CS0C1, "Wurth 687124183622 connector for horizontal, / Wurth 687324124422 for vertical"
J1: library part USB4105-15-A-120, "USB4105-15-A-120"
L1: library part 7440430018, "WE-TPC SMT Tiny Power Inductor, 4828, 1.8µH, 2.7A, 25mΩ", Case/Size Code=4828, DC Resistance=20mΩ, DC Resistance Max=25mΩ, Inductance=1.8µH, Manufacturer="Wurth Elektronik", Operating Temperature Max=125°C, Operating Temperature Min=-40°C, Rated Current=2.7A, Saturation Current=2.45A, Self Resonant Frequency=120MHz, Category="Shielded Power Inductors", ComponentLink1Description="Website Link", ComponentLink1URL=https://www.we-online.com/redexpert/article/7440430018?ad, ComponentLink2Description="Datasheet Link", ComponentLink2URL=https://www.we-online.com/redexpert/spec/7440430018?ad, Height=2.8mm, Length=4.8mm, Manufacturer Part Number=7440430018, Match Code=WE-TPC, Mount="Surface Mount", Packaging="Tape and Reel", Width=4.8mm
L2: library part 7440700100, "WE-TPC SMT Tiny Power Inductor, 8020, 10µH, 2A, 94mΩ", Case/Size Code=8020, DC Resistance=78mΩ, DC Resistance Max=94mΩ, Inductance=10µH, Manufacturer="Wurth Elektronik", Operating Temperature Max=125°C, Operating Temperature Min=-40°C, Rated Current=2A, Saturation Current=1.55A, Self Resonant Frequency=30MHz, Category="Shielded Power Inductors", ComponentLink1Description="Website Link", ComponentLink1URL=https://www.we-online.com/redexpert/article/7440700100?ad, ComponentLink2Description="Datasheet Link", ComponentLink2URL=https://www.we-online.com/redexpert/spec/7440700100?ad, Height=1.8mm, Length=8mm, Manufacturer Part Number=7440700100, Match Code=WE-TPC, Mount="Surface Mount", Packaging="Tape and Reel", Width=8mm
L3: library part 0603CT-2N0XJRW
L4: library part 0402CT, "0402 Coil - Coilcraft"
Q1: library part PJA3430_R1_00001, "20V/2A N-Channel Enhancment Mode MOSFET"
R3 R4 R11 R12 R13 R14 R15 R16 R17 R18 R19 R20: library part "Res 0402"
SW1: "WS-TASV SMT Tact Switch with ground terminal, SPST-NO, 12VDC, 50mA, 450g", Manufacturer="Wurth Elektronik", Operating Temperature Max=85°C, Operating Temperature Min=-40°C, Rated Current=50mA, Rated Voltage=12VDC, Category="Tact Switches", Circuit=SPST-NO, ComponentLink1Description="Website Link", ComponentLink1URL=https://www.we-online.com/redexpert/article/435151014845?ad, ComponentLink2Description="Datasheet Link", ComponentLink2URL=https://www.we-online.com/redexpert/spec/435151014845?ad, Contact Material="Stainless Steel", Contact Plating=Silver, Height=1.4mm, Length=3mm, Manufacturer Part Number=435151014845, Match Code=WS-TASV, Mount="Surface Mount", Operation Force=450g, Packaging="Tape and Reel", Terminal Material="Copper Alloy", Terminal Plating=Silver, Washable=No, Width=2.6mm
U1: "Optical Sensor for Heart Rate Monitor IC"
U2: "Dual Input USB/AC Adapter / Li-Ion Battery Charger with / 600mA Buck Converter"
U3: "Ultra­Low­Power SoC with RISC­V Single­Core CPU / Supporting IEEE 802.11b/g/n (2.4 GHz Wi­Fi) and Bluetooth® 5 (LE)"
U4: "4-Mbit SPI Serial Flash Memory with Dual-I/O and Quad-I/O Support"
X1: "ECX-2236B2 SMD CRYSTAL 40MHz +-10ppm"

## Via types
v1: diameter 0.65, hole 0.3, Top Layer to Bottom Layer, tented both sides, 148 vias
v2: diameter 0.6, hole 0.3, Top Layer to Bottom Layer, tented both sides, 6 vias

## Nets (pads, with @x,y where several pads share a name; then routed paths per layer and width w, separated by ;. In a path a pad name is that pad's centre, name@x,y a point inside that pad or via, vN(x,y) a via of type N, cw(c..) or ccw(c..) an arc to the next point about the centre after c; other vN are vias at no path point)
3V3: C1.2 C2.2 C3.2 C5.2 C6.2 C7.2 C16.2 C17.2 C18.1 C19.2 C25.2 C26.2 C27.2 C28.2 D1.A D2.A D9.A DS1.15 DS1.16 L1.1 L2.1 L3.1 Q2.2 R5.2 R11.2 R13.2 R14.2 R15.2 R19.2 U1.1 U1.8 U3.11 U3.17 U3.31 U3.32 | length 154
  Top Layer w0.2: U3.17 U3.17@12,20.075 ; U3.17@12,20.2 12.7,20.9 C27.2 ; U3.11 13.337,16.9 13.637,16.6 C25.2@15.65,16.6 ; R11.2 14.65,13.45 15.7,14.5 C25.2 ; v1(26.9,10.1) 27.7,9.3 42.8,9.3 43.7,8.4 R19.2 ; R19.2@43.8,6.25 44.15,6.6 D9.A
  Top Layer w0.3: C27.2 14.724,21.424 16.367,21.424 16.801,21.858 16.801,23.401 17.1,23.7 Q2.2@17.4,23.7 ; Q2.2 17.55,25.95 18.6,27 ; 18.6,27.029 20.629,27.029 21.2,27.6 22.3,27.6 C2.2@22.35,27.65 ; R13.2 21.7,26.5 21.9,26.7 v1(22.5,26.7) 22.45,26.75 C2.2@22.45,27.55 ; R14.2@25.7,25.9 25.7,25.95 26.083,26.333 v1@26.433,26.333 ; C1.2 26.35,27.1 v1@26.35,26.645 ; v1@26.5,26.5 v1(26.5,26.4) 27.25,25.65 27.25,21.115 26.95,20.814 L2.1 ; C16.2@38.676,25.724 39.797,25.724 41.129,27.056 42.302,27.056 42.558,26.8 43.55,26.8 DS1.16 44.85,26.75 45.3,26.3 46.35,26.3 DS1.15
  Top Layer w0.35: v1(4.5,14.771) 4.515,14.786 5.086,14.786 C26.2@5.1,14.8 ; C26.2 C28.2 6.8,14.8 7.7,15.7 U3.31@7.7,16.35 ; C18.1@11.8,10.1 11.813,10.1 13.4,11.687 v1(13.4,11.7) ; R15.2 13.35,11.7 v1(13.4,11.7) ; R11.2@13.425,13.45 13.425,11.725 v1(13.4,11.7) ; v1(26.9,10.1) L2.1@26.9,13.4 ; C16.2@38.6,25.6 38.6,24.774 38.675,24.699 38.675,24.524 C17.2 39.297,24.997 39.297,25.088 v1(39.355,25.145)
  Bottom Layer w0.25: D2.A 23.4,25.8 23.775,25.425 24.275,25.425 U1.8@24.4,25.3
  Bottom Layer w0.3: D2.A@22.525,25.825 22.525,26.675 v1(22.5,26.7) 23.4,27.6 25.3,27.6 v1(26.5,26.4) ; U1.1@25.7,26.1 25.8,26.1 26.033,26.333 26.433,26.333 v1(26.5,26.4) ; D1.A@27.35,25.9 26.917,26.333 26.567,26.333 v1(26.5,26.4) ; D1.A 30.5,25.8 31.5,26.8
  Bottom Layer w0.35: v1(4.5,14.771) 5.355,14.771 5.476,14.65 6.25,14.65 7.2,15.6 8.196,15.6 8.596,15.2 8.596,12.8 ; 8.6,12.8 9.7,11.7 v1(13.4,11.7) 15.3,11.7 16.9,10.1 v1(26.9,10.1) ; v1(31.3,40.7) 31.381,40.7 31.781,40.3 34.7,40.3 36,39 36,31.3 ; 31.5,26.8 36,31.3 ; v1(39.355,25.145) 37.155,25.145 36,26.3 36,31.3
GND: AE1.2 AE1.3 B1.2 C1.1 C2.1 C4.1 C5.1 C6.1 C7.1 C9.1 C10.1 C11.1 C12.1 C13.1 C14.1 C15.1 C16.1 C17.1 C18.2 C19.1 C20.1 C21.1 C22.1 C23.1 C24.1 C25.1 C26.1 C27.1 C28.1 C29.1 C30.1 D5.2 D8.1 DS1.17 DS1.M1 DS1.M2 DS1.M3 DS1.M4 J1.A1 J1.A12 J1.Shield R1.1 R2.1 R6.1 R7.1 R8.1 R9.1 R10.1 R18.1 SW1.A1 SW1.A2 SW1.G1 SW1.G2 U1.2 U2.8 U2.9 U2.17 U3.33 U4.8 X1.2 X1.4 | length 32.1
  Top Layer w0.15: v1@2.4,16.4 2.835,15.965 C23.1 ; v1@2.4,16.5 2.496,16.596 2.604,16.596 3.273,17.265 X1.2 3.273,17.465 3.773,17.965 3.773,18.076 4.048,18.351 4.048,18.44 4.6,18.992 X1.4@4.6,19
  Top Layer w0.2: C22.1 2.096,16.825 2.3,16.622 v1@2.3,16.5 ; AE1.3 2.775,10.994 3.934,12.154 C24.1 ; C26.1@5.1,13.8 C28.1 ; v1(7.8,11.6) 7.886,11.686 8.186,11.686 8.6,12.1 C20.1@8.7,12.1 ; AE1.2 8.4,5.875 C19.1 ; D5.2 11.1,36.222 11.4,35.922 v1(11.4,35.8) ; C27.1 14.714,20.414 15.014,20.414 v1(15.1,20.5) 15.218,20.5 15.468,20.75 R18.1 ; v1(22,31.3) C4.1 ; v1(22.2,33.7) R8.1 ; C17.1 37.75,23.65 38.1,23.3 39.599,23.3 C9.1 ; v1(45,27.5) 45.122,27.5 45.372,27.25 DS1.17
  Top Layer w0.5: D8.1 39.16,14.95 v1@40.5,14.95
  Bottom Layer w0.2: U1.2@25.779,25.379 25.779,25.321 25.85,25.25 26.177,25.25 26.4,25.027 v1(26.521,25.027)
  other v1: 13.6,1.6 16.6,1.6 19.6,1.6 22.6,1.6 25.6,1.6 28.6,1.6 31.6,1.6 34.6,1.6 37.6,1.6 40.6,1.6 43.6,1.6 46.6,1.6 48.1,4.6 40.6,7.6 15.1,10.6 48.1,10.6 1.6,13.6 22.6,13.6 25.6,13.6 28.6,13.6 31.6,13.6 43.6,13.6 46.6,13.6 40.6,15 2.3,16.45 24.1,16.6 30.1,16.6 33.1,16.6 45.1,16.6 17.4,17.3 45,18.2 16.072,22.16 3.1,22.6 6.1,22.6 1.6,25.6 4.6,25.6 16.6,25.6 31.6,25.6 34.6,25.6 3.1,28.6 6.1,28.6 9.1,28.6 18.1,28.6 21.1,28.6 24.1,28.6 27.1,28.6 30.1,28.6 10.6,31.6 16.6,31.6 19.6,31.6 34.6,31.6 45,31.7 28,32.2 8.596,32.9 28,33.4 3.1,34.6 28,34.6 42.1,34.6 45.1,34.6 48.1,34.6 30,36.4 1.6,37.6 4.6,37.6 22.6,37.6 25.6,37.6 34.6,37.6 37.6,37.6 40.6,37.6 43.6,37.6 46.6,37.6 8.9,39.3 9.1,40.6 12.1,40.6 36.1,40.6 39.1,40.6 42.1,40.6 45.1,40.6 48.1,40.6 1.6,43.6 4.6,43.6 7.6,43.6 10.6,43.6 3.1,46.6 6.1,46.6 9.1,46.6 12.1,46.6 15.1,46.6 18.1,46.6 21.1,46.6 24.1,46.6 27.1,46.6 30.1,46.6 33.1,46.6 36.1,46.6 39.1,46.6 42.1,46.6 45.1,46.6 48.1,46.6
  other v2: 9.05,16.55 10.15,16.55 11.25,16.55 11.25,17.65 9.05,18.75 11.25,18.75
NetAE1_1: AE1.1 C24.2 L4.2 | length 5.2
  Top Layer w0.637: AE1.1 4.575,9.723 cw(c7.115,9.723) 5.319,11.519 L4.2@5.8,12
NetC3_1: C3.1 R5.1 R6.2 U2.6 | length 7
  Top Layer w0.2: U2.6 30.166,34.2 32.401,36.435 R6.2 R6.2
  Top Layer w0.25: R5.1@31.5,38.5 31.525,38.525 32.526,38.525 C3.1 32.476,38.425 R6.2@32.476,37.524
NetC8_1: C8.1 D7.1 D8.2 | length 4.1
  Top Layer w0.5: D7.1@36.55,11.34 36.55,13 C8.1@36.563,13.012 ; C8.1@36.563,12.762 38.987,12.762 D8.2
NetC8_2: C8.2 D6.2 L2.2 Q1.3 | length 11.1
  Top Layer w0.5: Q1.3 33.875,19.625 34.6,18.9 L2.2@34.6,14.6 ; L2.2@34.85,14.65 C8.2@36.5,14.65 ; C8.2@36.5,14.6 36.6,14.7 36.6,16.225 D6.2
NetC9_2: C9.2 DS1.5 | length 6.6
  Top Layer w0.2: C9.2 41.322,21.599 41.671,21.25 46.15,21.25 DS1.5@46.2,21.3
NetC10_2: C10.2 DS1.18 | length 5.4
  Top Layer w0.2: C10.2@38.5,27.1 C10.2 39.15,27.75 DS1.18
NetC11_2: C11.2 DS1.20 | length 4.9
  Top Layer w0.2: C11.2 38.65,28.75 43.45,28.75 DS1.20@43.5,28.8
NetC13_2: C13.2 DS1.22 | length 5
  Top Layer w0.2: C13.2 39.3,30.2 39.7,29.8 43.3,29.8 DS1.22@43.4,29.7
NetC15_2: C15.2 DS1.24 | length 5.3
  Top Layer w0.2: C15.2 39.4,31.7 40.35,30.75 43.45,30.75 DS1.24@43.5,30.7
NetC20_2: C20.2 L3.2 U3.2 U3.3 | length 4.5
  Top Layer w0.25: C20.2 8.7,14.112 8.9,14.313 U3.2@8.9,15.1 ; C20.2@8.825,13.075 8.869,13.075 10.109,11.835 L3.2 ; U3.2 8.9,15.2 U3.3@9.4,15.2
NetC21_2: C21.2 L4.1 U3.1 | length 3.6
  Top Layer w0.637: L4.1 ccw(c5.963,12.949) 6.575,12.773 6.619,12.924 ; 6.619,12.924 cw(c7.231,12.747) 6.772,13.189 ccw(c6.4,13.55) 6.8,13.22 cw(c7.289,12.812) 7.023,13.391 C21.2 7.892,13.892 ccw(c7.44,14.341) 8.067,14.228 cw(c8.7,14.112) 8.126,14.404 ccw(c7.558,14.691) 8.194,14.681 8.2,15 8.2,15.059 cw(c8.831,14.972) 8.218,15.144 8.235,15.206 8.25,15.26 ccw(c7.638,15.433) 8.257,15.283 8.257,15.2
NetC22_2: C22.2 U3.29 X1.1 | length 8.9
  Top Layer w0.2: C22.2 2.546,19.1 X1.1@3.2,19.1 ; X1.1@3.273,19.1 3.273,19.873 3.55,20.15 5.05,20.15 5.55,19.65 5.55,17.75 5.87,17.43 6.633,17.43 6.663,17.4 U3.29
NetC23_2: C23.2 R12.2 X1.3 | length 3.6
  Top Layer w0.2: C23.2 4.423,17.215 X1.3 4.8,17.138 4.8,16.517 5.225,16.092 5.658,16.092 R12.2
NetD1_K: D1.K U1.3 | length 1.9
  Bottom Layer w0.25: U1.3 25.775,24.575 25.978,24.575 26.078,24.475 26.085,24.475 26.237,24.323 27.177,24.323 D1.K@27.4,24.1
NetD2_K: D2.K U1.4 | length 3.8
  Bottom Layer w0.25: D2.K@22.6,24.15 22.825,23.925 23.415,23.925 23.965,23.375 25.335,23.375 25.575,23.615 25.575,23.875 25.65,23.95 U1.4
NetD3_K: D3.K R3.1 | length 1.4
  Top Layer w0.3: R3.1 32.275,32.825 33.575,32.825 D3.K@33.6,32.8
NetD4_K: D4.K R4.1 | length 1.7
  Top Layer w0.3: R4.1 33.45,34 D4.K D4.K@33.7,34.3
NetD9_K: D9.K R20.2 | length 1.6
  Top Layer w0.25: D9.K 46.65,5 46.85,5.2 R20.2@47,5.2
NetDS1_2: DS1.2 Q1.1 | length 7.8
  Top Layer w0.2: Q1.1@36.4,21.1 36.475,21.1 37.825,19.75 DS1.2
  Top Layer w0.3: Q1.1 Q1.1@36.4,21.1
NetDS1_3: DS1.3 Q1.2 R10.2 | length 11.7
  Top Layer w0.2: R10.2@38.1,21 38.546,21 39.296,20.25 DS1.3
  Top Layer w0.3: Q1.2 36.475,23 37.275,22.2 37.9,22.2 38.2,21.9 R10.2@38.2,21.122
NetDS1_8: DS1.8 U3.8 | length 40.2
  Top Layer w0.2: U3.8 12.475,15.225 12.9,14.8 v1@13,14.8
  Top Layer w0.25: DS1.8@43.8,22.8 44.1,22.8 44.523,22.377 44.923,22.377 v1(45,22.3)
  Bottom Layer w0.2: v1(13,14.7) 13.108,14.7 13.53,14.279 17.179,14.279 19,16.1 19,19.4 19.2,19.6 42.3,19.6 v1(45,22.3) v1@45.1,22.3
NetDS1_9: DS1.9 U3.9 | length 39.6
  Top Layer w0.2: U3.9 12.85,15.9 13.462,15.288 13.675,15.288 13.98,14.983 v1(14.101,14.983) ; v1(45.1,23.2) 45.125,23.225 46.375,23.225 DS1.9@46.4,23.2
  Bottom Layer w0.2: v1(14.101,14.983) 17.283,14.983 18.6,16.3 18.6,19.7 18.9,20 41.74,20 44.719,22.979 44.757,22.979 44.978,23.2 v1(45.1,23.2)
NetDS1_10: DS1.10 U3.10 | length 36.5
  Top Layer w0.2: U3.10 13.272,16.4 13.686,15.986 14.014,15.986 v1(14.1,15.9) ; v1(42.1,23.5) 42.222,23.5 42.472,23.75 DS1.10
  Bottom Layer w0.2: v1(14.1,15.9) 17.6,15.9 18.2,16.5 18.2,19.9 18.7,20.4 39,20.4 v1(42.1,23.5)
NetDS1_11: DS1.11 U3.12 | length 37.2
  Top Layer w0.2: U3.12 13.878,17.4 13.978,17.3 v1(14.1,17.3) ; v1(45.1,24.2) 45.125,24.225 46.075,24.225 DS1.11@46.1,24.2
  Bottom Layer w0.2: v1(14.1,17.3) 16.35,17.3 16.85,17.8 16.85,19.15 17.6,19.9 17.634,19.9 18.534,20.8 38.44,20.8 41.84,24.2 v1(45.1,24.2)
NetDS1_12: DS1.12 U3.13 | length 34
  Top Layer w0.2: U3.13@12.5,17.9 12.51,17.91 12.961,17.91 13.051,18 v1(15.6,18)
  Top Layer w0.25: 42.378,24.75 DS1.12
  Bottom Layer w0.2: v1(15.6,18) 16.302,18.702 16.302,19.167 18.334,21.2 38.274,21.2 41.974,24.9 v1@42.1,24.9
  other v1: 42.1,24.919
NetDS1_13: DS1.13 U3.16 | length 36.9
  Top Layer w0.25: U3.16 12.85,19.4 13.223,19.773 13.223,19.923 v1(13.3,20) ; v1(45.1,25.2) 45.125,25.225 46.025,25.225 DS1.13@46.1,25.3
  Bottom Layer w0.2: v1(13.3,20) 13.342,20.042 13.342,20.442 15.8,22.9 23.274,22.9 23.624,22.55 25.676,22.55 26.026,22.9 38.8,22.9 41.5,25.6 44.616,25.6 44.916,25.3 v1@45.1,25.3
NetDS1_14: DS1.14 U3.27 | length 49.3
  Top Layer w0.15: v1(5.39,21.55) 5.486,21.454 5.486,21.169 6.575,20.08 6.575,18.725 6.9,18.4 U3.27
  Top Layer w0.25: v1(42,26.327) 42.077,26.251 42.549,26.251 43.1,25.7 DS1.14@43.6,25.7
  Bottom Layer w0.2: v1(5.39,21.55) 5.476,21.464 5.476,21.021 6.625,19.872 6.625,18.676 7.401,17.901 9.125,17.901 14.525,23.3 23.439,23.3 23.789,22.95 25.511,22.95 25.861,23.3 38.5,23.3 41.441,26.241 41.941,26.241 v1@42,26.3
NetJ1_A5: J1.A5 R2.2 | length 6.6
  Top Layer w0.25: R2.2 5.5,41.65 5.5,37.5 5.804,37.196 6.592,37.196 6.725,37.329 7.654,37.329 J1.A5
NetJ1_B5: J1.B5 R1.2 | length 6.6
  Top Layer w0.2: R1.2@5.1,30.5 4.983,30.617 4.983,34.043 5.519,34.579 6.245,34.579 6.474,34.35 J1.B5
NetL1_2: L1.2 U2.10 | length 3.2
  Top Layer w0.25: L1.2@23.5,35 25.4,35 25.7,34.7 U2.10
NetQ2_1: Q2.1 R16.1 | length 1.4
  Top Layer w0.3: Q2.1 19.475,23.75 19.475,25.075 R16.1
NetQ2_3: Q2.3 R17.2 | length 1.5
  Top Layer w0.25: R17.2 18.554,20.403 18.554,21.154 Q2.3@18.6,21.2
NetR3_2: R3.2 U2.4 | length 2
  Top Layer w0.2: U2.4 30.431,33.2 30.732,32.9 R3.2
NetR4_2: R4.2 R16.2 U2.5 | length 26.3
  Top Layer w0.25: v1(19.2,26.3) 19.277,26.223 19.386,26.223 20.1,25.51 20.1,25.4 R16.2 ; U2.5 30.3,33.7 30.6,34 R4.2 31.4,34.1 31.4,34.7 31.641,34.941 32.638,34.941 v1(32.659,34.921)
  Bottom Layer w0.25: v1(19.2,26.3) 19.2,28.3 20.35,29.45 30.85,29.45 32.659,31.259 v1(32.659,34.921)
NetR7_2: R7.2 U2.2 | length 2.1
  Top Layer w0.2: U2.2 30.3,32.2 30.8,31.7 R7.2@30.8,31.2
NetR8_2: R8.2 U2.14 | length 3
  Top Layer w0.25: R8.2@23.954,33.6 R8.2@23.954,33.646 ; R8.2@24,33.6 24.073,33.6 24.973,32.7 U2.14
NetR9_2: R9.2 U2.3 | length 3.5
  Top Layer w0.2: U2.3 30.366,32.7 30.966,32.1 31.6,32.1 31.9,31.8 31.9,31.3 R9.2@32,31.2
NetR11_1: R11.1 U3.7 | length 2.4
  Top Layer w0.25: U3.7 11.4,14.814 11.814,14.4 12,14.4 12.4,14 12.4,13.6 12.5,13.5 R11.1@12.6,13.5
NetR12_1: R12.1 U3.30 | length 2
  Top Layer w0.15: R12.1@5.8,16.8 5.9,16.9 U3.30
NetR15_1: R15.1 U3.6 | length 3.3
  Top Layer w0.25: U3.6@10.9,15.3 10.9,14.532 11.75,13.682 R15.1
NetR19_1: R19.1 SW1.B2 | length 1.2
  Top Layer w0.25: SW1.B2@42.7,4.8 43.25,4.8 R19.1
NetR20_1: R20.1 U3.28 | length 67.1
  Top Layer w0.15: v1@4.4,21.3 v1@4.46,21.3 ; v1@4.6,21.3 4.6,21.296 5.071,20.825 5.335,20.825 6.225,19.935 6.225,18.355 6.68,17.9 U3.28
  Top Layer w0.25: R20.1@46.9,6.3 v1(46.9,7.6)
  Bottom Layer w0.25: v1@4.4,21.4 1.7,21.4 1,20.7 1,15.8 1.273,15.527 5.306,15.527 5.58,15.254 6.146,15.254 6.994,16.102 8.402,16.102 9.096,15.407 9.096,13.012 9.808,12.3 12.804,12.3 12.908,12.404 25.592,12.404 27.9,10.096 27.9,9.746 28.046,9.6 44.8,9.6 46.8,7.6 v1(46.9,7.6)
  other v1: 4.499,21.397
NetSW1_B1: SW1.B1 U3.15 | length 37.7
  Top Layer w0.25: U3.15 13.544,18.9 13.723,19.079 v1(13.832,19.079)
  Top Layer w0.3: v1(15.2,19.015) 15.209,19.025 16.875,19.025 19.4,16.5 19.4,10.7 21.6,8.5 37.6,8.5 37.8,8.3 37.8,8.271 38.109,7.963 38.109,5.291 38.55,4.85 SW1.B1
  Bottom Layer w0.3: v1(13.832,19.079) 13.864,19.047 15.168,19.047 v1(15.2,19.015)
NetU3_19: U3.19 U4.6 | length 5.9
  Top Layer w0.2: U3.19 10.9,22.123 12.215,23.438 12.215,24.683 12.332,24.8 U4.6
NetU3_20: U3.20 U4.5 | length 5.6
  Top Layer w0.2: U3.20 10.4,24.2 11,24.8 U4.5
NetU3_21: U3.21 U4.1 | length 16
  Top Layer w0.2: U3.21 9.9,25.8 11.2,27.1 14.4,27.1 15.4,28.1 15.4,31.8 U4.1@15.5,31.9
NetU3_22: U3.22 U4.2 | length 15
  Top Layer w0.2: U3.22 9.4,25.9 11,27.5 13.7,27.5 14.1,27.9 14.1,31.4 U4.2@14.2,31.5
NetU3_23: U3.23 U4.3 | length 14.5
  Top Layer w0.2: U3.23 8.9,25.966 10.834,27.9 12.5,27.9 12.817,28.217 12.817,31.883 U4.3@12.8,31.9 ; U4.3@12.8,32 U4.3
NetU3_24: U3.24 U4.4 | length 13.3
  Top Layer w0.2: U3.24 8.4,26.031 10.669,28.3 11.3,28.3 11.6,28.6 U4.4@11.6,31.7
SCL_HRM: R14.1 U1.10 U3.5 | length 27.9
  Top Layer w0.25: v1(10.1,13.004) 10.6,13.504 10.6,14.196 10.4,14.396 U3.5 ; v1(20.422,18.115) 20.314,18.115 20.039,18.39 19.877,18.39 19.7,18.567 19.7,20.85 R14.1 ; R14.1@24.862,26.05 24.862,26.55 25.004,26.692 v1(25.004,26.8)
  Bottom Layer w0.25: v1@10.1,13.004 17.141,13.004 20.396,16.259 20.396,18.089 v1(20.422,18.115)
  Bottom Layer w0.3: U1.10 25.002,26.052 25.002,26.798 v1(25.004,26.8)
SDA_HRM: R13.1 U1.9 U3.4 | length 26.1
  Top Layer w0.25: v1@9.9,14.208 U3.4 ; v1(19.679,17.6) 19.679,17.676 19.25,18.105 19.25,21.036 21.7,23.486 21.7,24.5 21.725,24.525 R13.1@21.825,24.525 ; R13.1 R13.1@21.825,24.525 ; v1(24.1,26.8) R13.1@21.825,24.525
  Bottom Layer w0.2: v1(24.1,26.8) 24.186,26.714 24.186,26.15 24.286,26.05 U1.9
  Bottom Layer w0.25: v1(9.8,14) 9.877,13.923 10.43,13.923 10.9,13.454 16.955,13.454 19.647,16.146 19.647,17.568 v1(19.679,17.6)
USB_Connected: R17.1 R18.2 U3.14 | length 5.6
  Top Layer w0.2: U3.14 14.3,18.4 14.511,18.611 14.511,19.287 15.045,19.821 15.445,19.821 15.474,19.85 R18.2
  Top Layer w0.25: R18.2 16.075,19.875 17.125,19.875 R17.1
USB_N: D5.3 J1.A7 J1.B7 U3.25 | length 23.9
  Top Layer w0.2: J1.A7 8.55,35.85 8.7,36 8.7,36.7 ; J1.B7 8.55,36.85 8.7,36.7 ; D5.3@10.2,37.2 9.6,37.2 9.1,36.7 8.7,36.7
  Top Layer w0.25: v1(7.7,20.4) 7.712,20.388 7.712,19.4 U3.25 ; v1(10.2,35.9) 10.175,35.925 10.175,36.975 D5.3@10.2,37
  Bottom Layer w0.25: v1@7.7,20.5 7.704,20.504 7.704,22.246 7.45,22.5 7.45,28.85 9.75,31.15 9.75,32.65 10.9,33.8 10.9,35.2 v1(10.2,35.9)
USB_P: D5.4 J1.A6 J1.B6 U3.26 | length 24
  Top Layer w0.2: J1.A6 6.817,36.35 6.7,36.233 6.7,35.467 6.817,35.35 J1.B6 8.95,35.35 9.2,35.1 9.95,35.1 10.1,34.95 D5.4@10.1,34.9
  Top Layer w0.25: v1(7,21.6) 6.996,21.596 6.996,19.218 7.314,18.9 U3.26@7.7,18.9 ; v1(9.196,34.454) 9.975,34.454 10.1,34.579 D5.4@10.1,34.6
  Bottom Layer w0.25: v1(7,21.6) 7,27.4 7,27.525 6.736,27.525 6.736,28.275 7,28.275 7,29.1 7.2,29.3 7.7,29.8 9.3,31.4 9.3,34.108 9.273,34.135 9.273,34.377 v1(9.196,34.454)
VBAT: B1.1 C4.2 D3.A D4.A U2.7 U2.11 U2.15 | length 32.1
  Top Layer w0.2: v1(25.3,33.8) 25.7,34.2 U2.11 ; U2.7 30.1,34.7 30.414,35.014 30.414,35.514 v1(30.5,35.6) ; v1(35.2,35.3) 35.2,34.4 35.3,34.3 D3.A
  Top Layer w0.3: B1.1@17.2,37.2 17.669,36.731 17.669,35.91 21.379,32.2 24.149,32.2 v1@24.274,32.326 ; v1(24.3,32.2) U2.15 ; C4.2 v1@24.45,32.15
  Bottom Layer w0.3: v1(24.3,32.2) 25.233,33.133 25.233,33.733 v1(25.3,33.8) 25.3,34.7 26.2,35.6 v1(30.5,35.6) 30.55,35.65 34.755,35.65 35.038,35.367 35.267,35.367 v1@35.3,35.4
VCC_FLASH: C29.2 C30.2 U3.18 U4.7 | length 6.7
  Top Layer w0.3: U3.18 11.4,20.9 12.549,22.049 C30.2@14,22.049 ; C30.2 14.127,22.077 14.127,24.773 U4.7@14.1,24.8
VGH: C12.2 D6.1 DS1.21 | length 28
  Top Layer w0.3: D6.1 39.39,18.61 43.1,14.9 47.3,14.9 47.8,15.4 47.8,29 47.55,29.25 DS1.21
VGL: C14.2 D7.2 DS1.23 | length 29.6
  Top Layer w0.3: D7.2 47,10.8 48.6,12.4 48.6,29.4 47.75,30.25 DS1.23
VUSB: D5.5 J1.A4 J1.A9 U2.1 | length 38.6
  Top Layer w0.2: 29.39,30.89 29.39,31.69 29.4,31.7 U2.1
  Top Layer w0.3: v1(5.8,33.9) 6.865,33.9 6.915,33.85 7.525,33.85 J1.A9 ; v1(6.3,37.9) 6.395,37.9 6.845,38.35 7.35,38.35 J1.A4@7.6,38.6 ; 13.4,37.9 13.4,36.25 12.05,34.9 D5.5 12.15,34.75 16.85,34.75 18.4,33.2 18.4,31.7 19.8,30.3 28.8,30.3 29.39,30.89
  Top Layer w0.35: J1.A4@7.8,38.5 12.78,38.5 13.39,37.89
  Bottom Layer w0.3: v1(5.8,33.9) 5.8,37.305 6.3,37.805 v1(6.3,37.9)
pads on no net: D5.1 DS1.1 DS1.4 DS1.6 DS1.7 DS1.19 J1. J1.A8 J1.B8 L2.MP1 L2.MP2 U1.5 U1.6 U1.7 U2.12 U2.13 U2.16

## Polygon pours and split planes (outlines as drawn)
GND on Top Layer "GND_L01_P008" (solid, pour order 8): 4.25,0.05 45.75,0.05 46.35,0.65 47.15,0.65 48.15,1.65 48.45,1.65 48.45,2.05 49.65,3.25 49.65,4.45 49.95,4.75 49.95,45.95 49.45,46.45 49.55,46.55 49.55,47.05 48.65,47.95 48.65,48.35 48.55,48.35 47.15,49.75 45.25,49.75 44.95,50.05 4.15,50.05 3.85,49.75 3.15,49.75 2.35,48.95 1.85,48.95 0.35,47.45 0.35,46.05 -0.05,45.65 -0.05,4.65 0.05,4.55 0.05,4.05 0.147,3.622 0.35,3.15 0.527,2.739 0.75,2.45 1.1,2.1 1.05,2.05 1.05,1.85 1.35,1.85 2.45,0.75
3V3 on Top Layer "3V3_L01_P002" (solid, pour order 2): 10.1,11.186 9.1,10.186 9.1,8.8 12.5,8.8 12.5,10.886 12.2,11.186
3V3 on Top Layer "3V3_L01_P000" (solid, pour order 0): 9.5,9.5 11.5,9.5 12.4,10.4 12.4,11.9 12.1,12.2 9.7,12.2 8.9,11.4 8.9,10.1
GND on Top Layer "GND_L01_P009" (solid, pour order 9): 2.1,20.7 1.5,20.1 1.5,16.3 2.3,15.5 6.4,15.5 6.5,15.6 6.5,17.4 5.8,18.1 5.8,19.9 5,20.7 4.2,20.7
3V3 on Top Layer "3V3_L01_P001" (solid, pour order 1): 33,39 31,39 30.5,38.5 26.5,38.5 18.8,38.5 18.8,41.5 32,41.5 33.25,40.25 33.25,39.25
GND on Bottom Layer "GND_L02_P007" (solid, pour order 7): 4.4,0 45.9,0 46.5,0.6 47.3,0.6 48.3,1.6 48.6,1.6 48.6,2 49.8,3.2 49.8,4.4 50.1,4.7 50.1,45.9 49.6,46.4 49.7,46.5 49.7,47 48.8,47.9 48.8,48.3 48.7,48.3 47.3,49.7 45.4,49.7 45.1,50 4.3,50 4,49.7 3.3,49.7 2.5,48.9 2,48.9 0.5,47.4 0.5,46 0.1,45.6 0.1,4.6 0.2,4.5 0.2,4 0.297,3.572 0.5,3.1 0.677,2.689 0.9,2.4 1.25,2.05 1.2,2 1.2,1.8 1.5,1.8 2.6,0.7

## Keep-outs
Top Layer:
  lines w0.1: 3.1,20.8 2.1,20.8 1.4,20.1 1.4,16.2 2.2,15.4 6.4,15.4 6.6,15.6 6.6,16.3 ; 4.3,20.8 4.6,20.5 4.7,20.5 5.2,20.5 5.9,19.8 5.9,18.1 6.1,17.9
Keep-Out Layer:
  lines w0.1: 0,5 0.043,4.347 ; 0,5 0,45 ; 0,5 0.043,4.347 ; 0,5 0,45 ; 0,45 0.043,45.653 ; 0,45 0.043,45.653 ; 0.043,4.347 0.17,3.706 ; 0.043,4.347 0.17,3.706 ; 0.043,45.653 0.17,46.294 ; 0.043,45.653 0.17,46.294 ; 0.17,3.706 0.381,3.087 ; 0.17,3.706 0.381,3.087 ; 0.17,46.294 0.381,46.913 ; 0.17,46.294 0.381,46.913 ; 0.381,3.087 0.67,2.5 ; 0.381,3.087 0.67,2.5 ; 0.381,46.913 0.67,47.5 ; 0.381,46.913 0.67,47.5 ; 0.67,2.5 1.033,1.956 ; 0.67,2.5 1.033,1.956 ; 0.67,47.5 1.033,48.044 ; 0.67,47.5 1.033,48.044 ; 1.033,1.956 1.464,1.464 ; 1.033,1.956 1.464,1.464 ; 1.033,48.044 1.464,48.536 ; 1.033,48.044 1.464,48.536 ; 1.464,1.464 1.956,1.033 ; 1.464,1.464 1.956,1.033 ; 1.464,48.536 1.956,48.967 ; 1.464,48.536 1.956,48.967 ; 1.956,1.033 2.5,0.67 ; 1.956,1.033 2.5,0.67 ; 1.956,48.967 2.5,49.33 ; 1.956,48.967 2.5,49.33 ; 2.5,0.67 3.087,0.381 ; 2.5,0.67 3.087,0.381 ; 2.5,49.33 3.087,49.619 ; 2.5,49.33 3.087,49.619 ; 3.087,0.381 3.706,0.17 ; 3.087,0.381 3.706,0.17 ; 3.087,49.619 3.706,49.83 ; 3.087,49.619 3.706,49.83 ; 3.706,0.17 4.347,0.043 ; 3.706,0.17 4.347,0.043 ; 3.706,49.83 4.347,49.957 ; 3.706,49.83 4.347,49.957 ; 4.347,0.043 5,0 ; 4.347,0.043 5,0 ; 4.347,49.957 5,50 ; 4.347,49.957 5,50 ; 5,0 45,0 ; 5,0 45,0 ; 5,50 45,50 ; 5,50 45,50 ; 12.5,5 12.5,8 ; 12.5,5 37.5,5 ; 12.5,5 12.5,8 ; 12.5,5 37.5,5 ; 12.5,8 37.5,8 ; 12.5,8 37.5,8 ; 12.5,42 12.5,45 ; 12.5,42 37.5,42 ; 12.5,42 12.5,45 ; 12.5,42 37.5,42 ; 12.5,45 37.5,45 ; 12.5,45 37.5,45 ; 37.5,5 37.5,8 ; 37.5,5 37.5,8 ; 37.5,42 37.5,45 ; 37.5,42 37.5,45 ; 45,0 45.653,0.043 ; 45,0 45.653,0.043 ; 45,50 45.653,49.957 ; 45,50 45.653,49.957 ; 45.653,0.043 46.294,0.17 ; 45.653,0.043 46.294,0.17 ; 45.653,49.957 46.294,49.83 ; 45.653,49.957 46.294,49.83 ; 46.294,0.17 46.913,0.381 ; 46.294,0.17 46.913,0.381 ; 46.294,49.83 46.913,49.619 ; 46.294,49.83 46.913,49.619 ; 46.913,0.381 47.5,0.67 ; 46.913,0.381 47.5,0.67 ; 46.913,49.619 47.5,49.33 ; 46.913,49.619 47.5,49.33 ; 47.5,0.67 48.044,1.033 ; 47.5,0.67 48.044,1.033 ; 47.5,49.33 48.044,48.967 ; 47.5,49.33 48.044,48.967 ; 48.044,1.033 48.536,1.464 ; 48.044,1.033 48.536,1.464 ; 48.044,48.967 48.536,48.536 ; 48.044,48.967 48.536,48.536 ; 48.536,1.464 48.967,1.956 ; 48.536,1.464 48.967,1.956 ; 48.536,48.536 48.967,48.044 ; 48.536,48.536 48.967,48.044 ; 48.967,1.956 49.33,2.5 ; 48.967,1.956 49.33,2.5 ; 48.967,48.044 49.33,47.5 ; 48.967,48.044 49.33,47.5 ; 49.33,2.5 49.619,3.087 ; 49.33,2.5 49.619,3.087 ; 49.33,47.5 49.619,46.913 ; 49.33,47.5 49.619,46.913 ; 49.619,3.087 49.83,3.706 ; 49.619,3.087 49.83,3.706 ; 49.619,46.913 49.83,46.294 ; 49.619,46.913 49.83,46.294 ; 49.83,3.706 49.957,4.347 ; 49.83,3.706 49.957,4.347 ; 49.83,46.294 49.957,45.653 ; 49.83,46.294 49.957,45.653 ; 49.957,4.347 50,5 ; 49.957,4.347 50,5 ; 49.957,45.653 50,45 ; 49.957,45.653 50,45 ; 50,5 50,45 ; 50,5 50,45 ; 4.35,3.7 6.65,3.7 6.65,5.8 4.35,5.8 4.35,3.7

## Other copper
Top Layer:
  pour cut-out: 2.7,0 8.3,0 8.3,4.4 8.3,8 7.5,8 7.5,10.7 2.7,10.7
  text "Optical HRM / By Oblak / 12/2022" at 38.495,41.3 h1.52
Bottom Layer:
  pour cut-out: 2.7,0 8.3,0 8.3,4.4 8.3,8 7.5,8 7.5,10.7 2.7,10.7